# Altium PCB lagd_pcb.PcbDoc (part 1 of 7)
Units mm, origin at the board's own origin, x right, y up, seen from the top; angles counter-clockwise.
Board outline 172 x 145 mm, 6 copper layers (Top Layer, Layer 1, Layer 2, Layer 3, Layer 4, Bottom Layer), stack 0.816 mm thick; 588 components, 338 nets, 2165 pads, 565 vias.
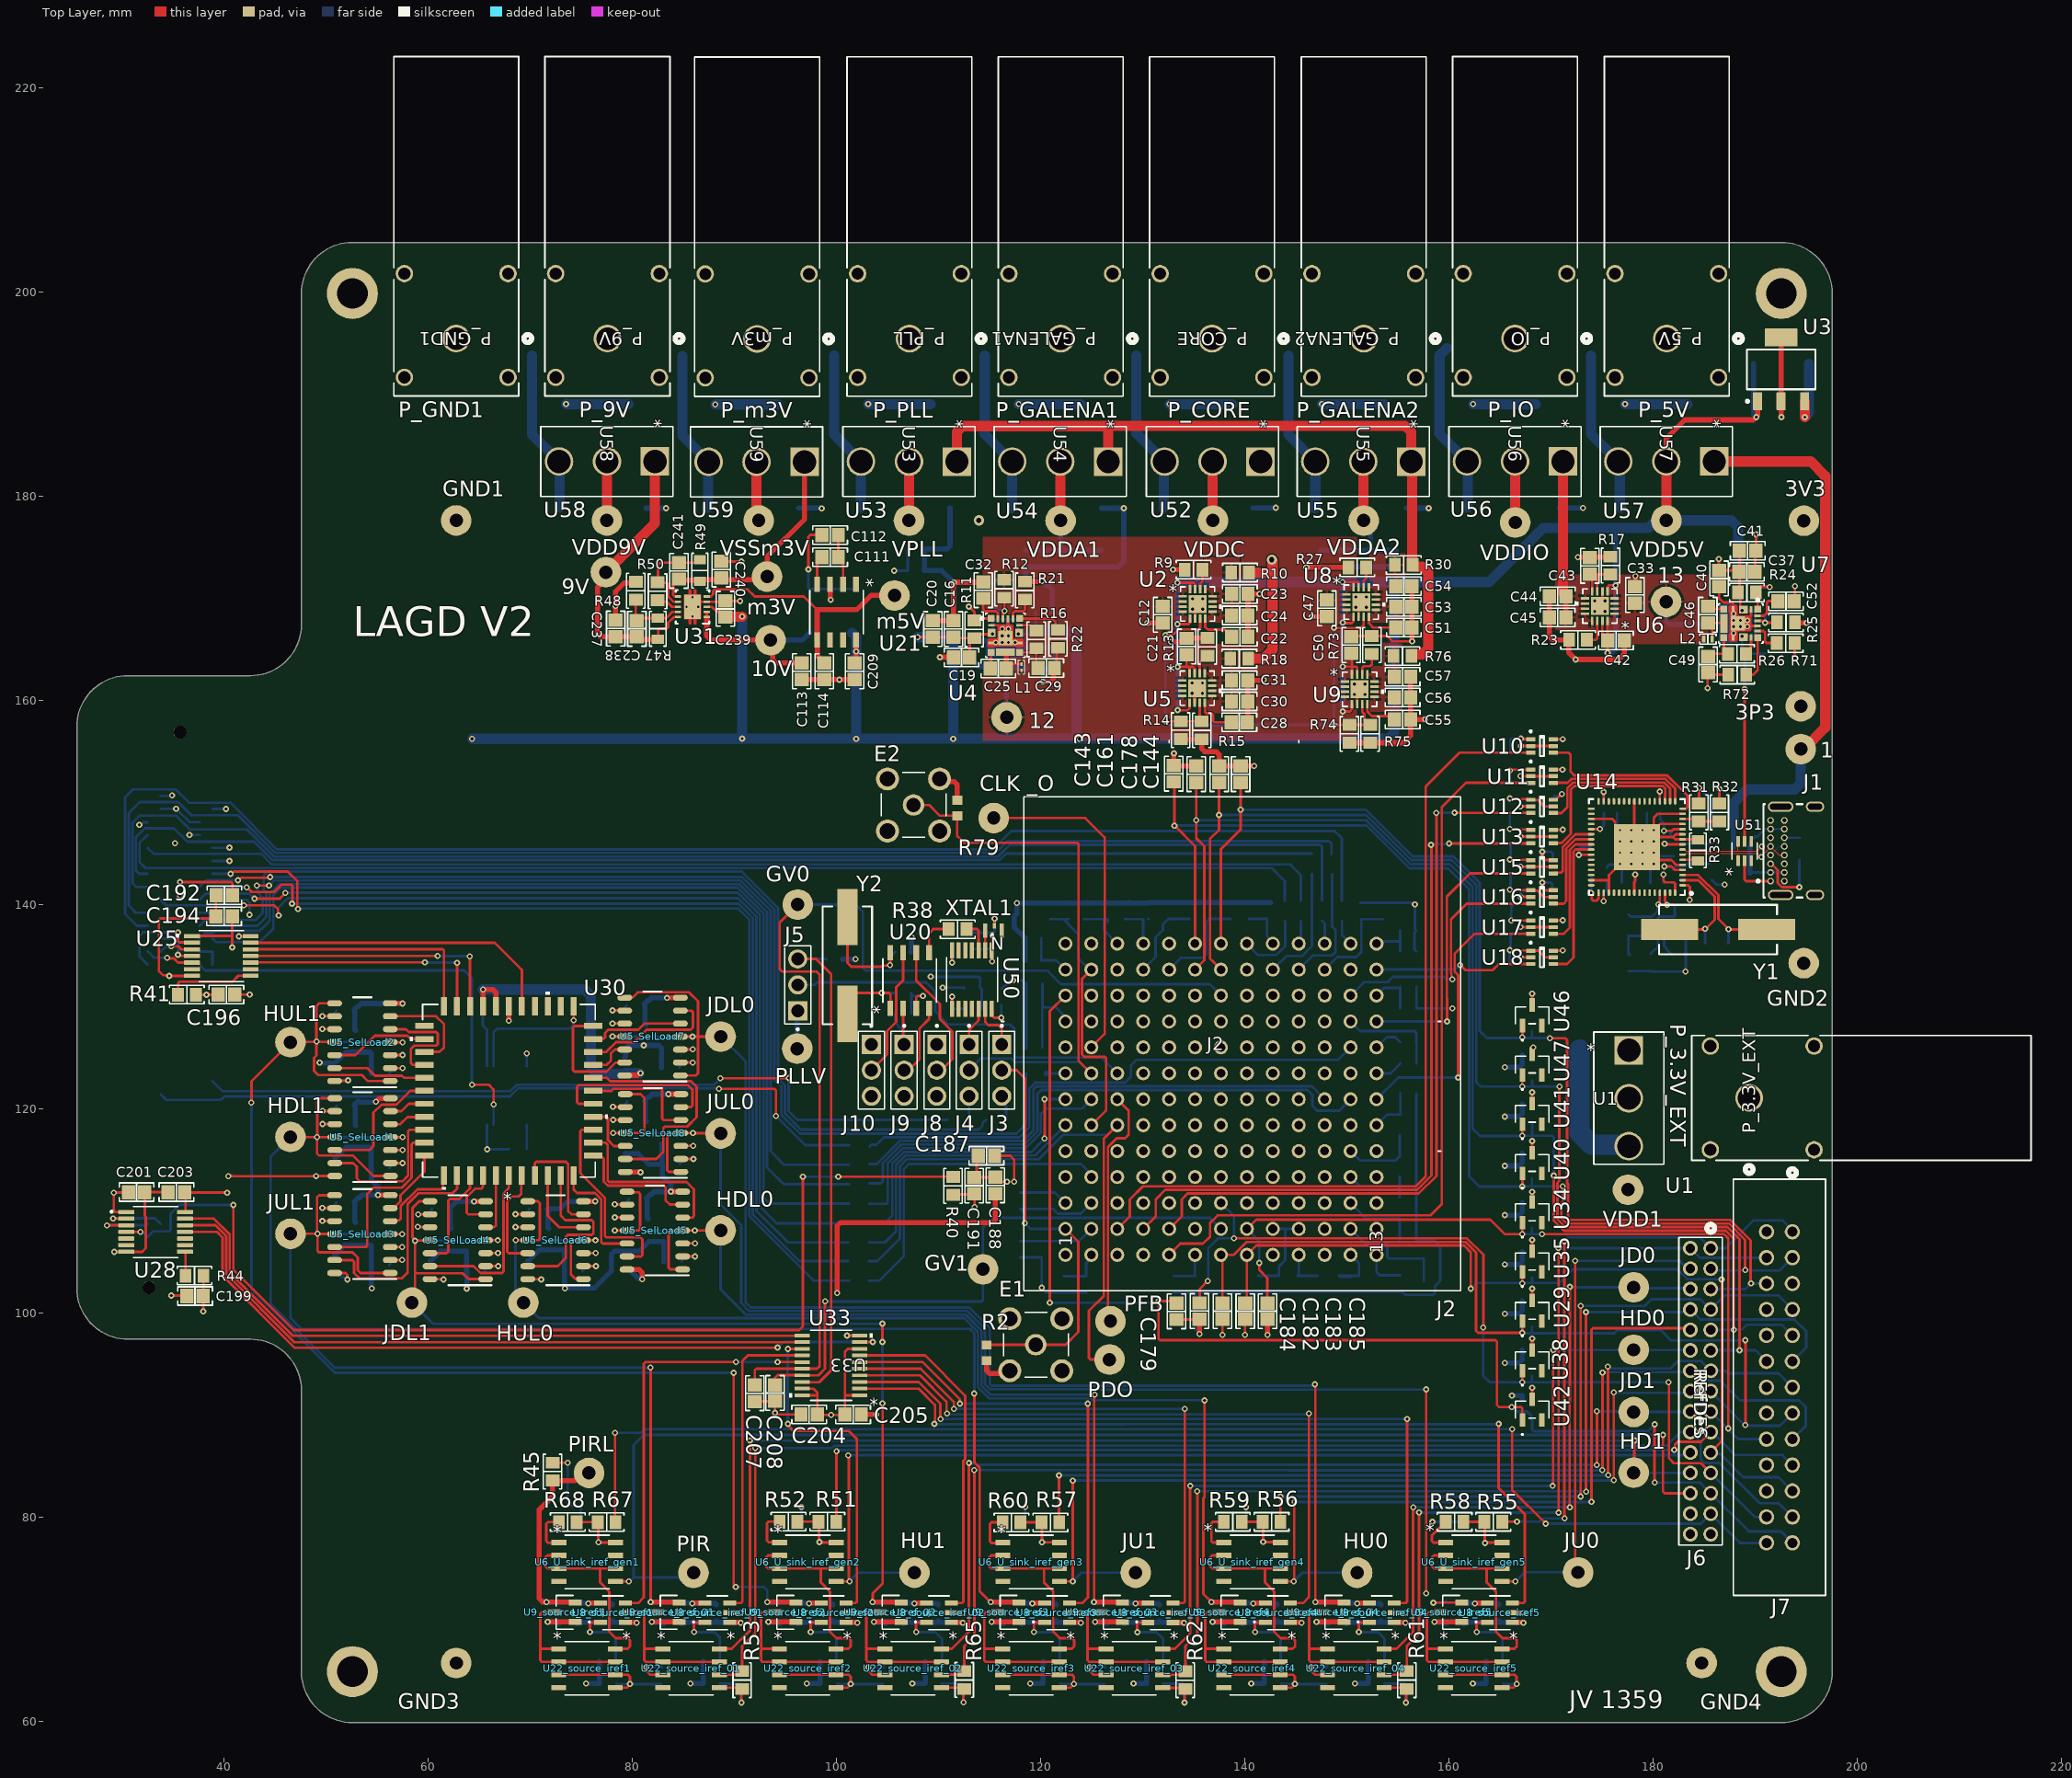
[diagram p0: Top Layer view]
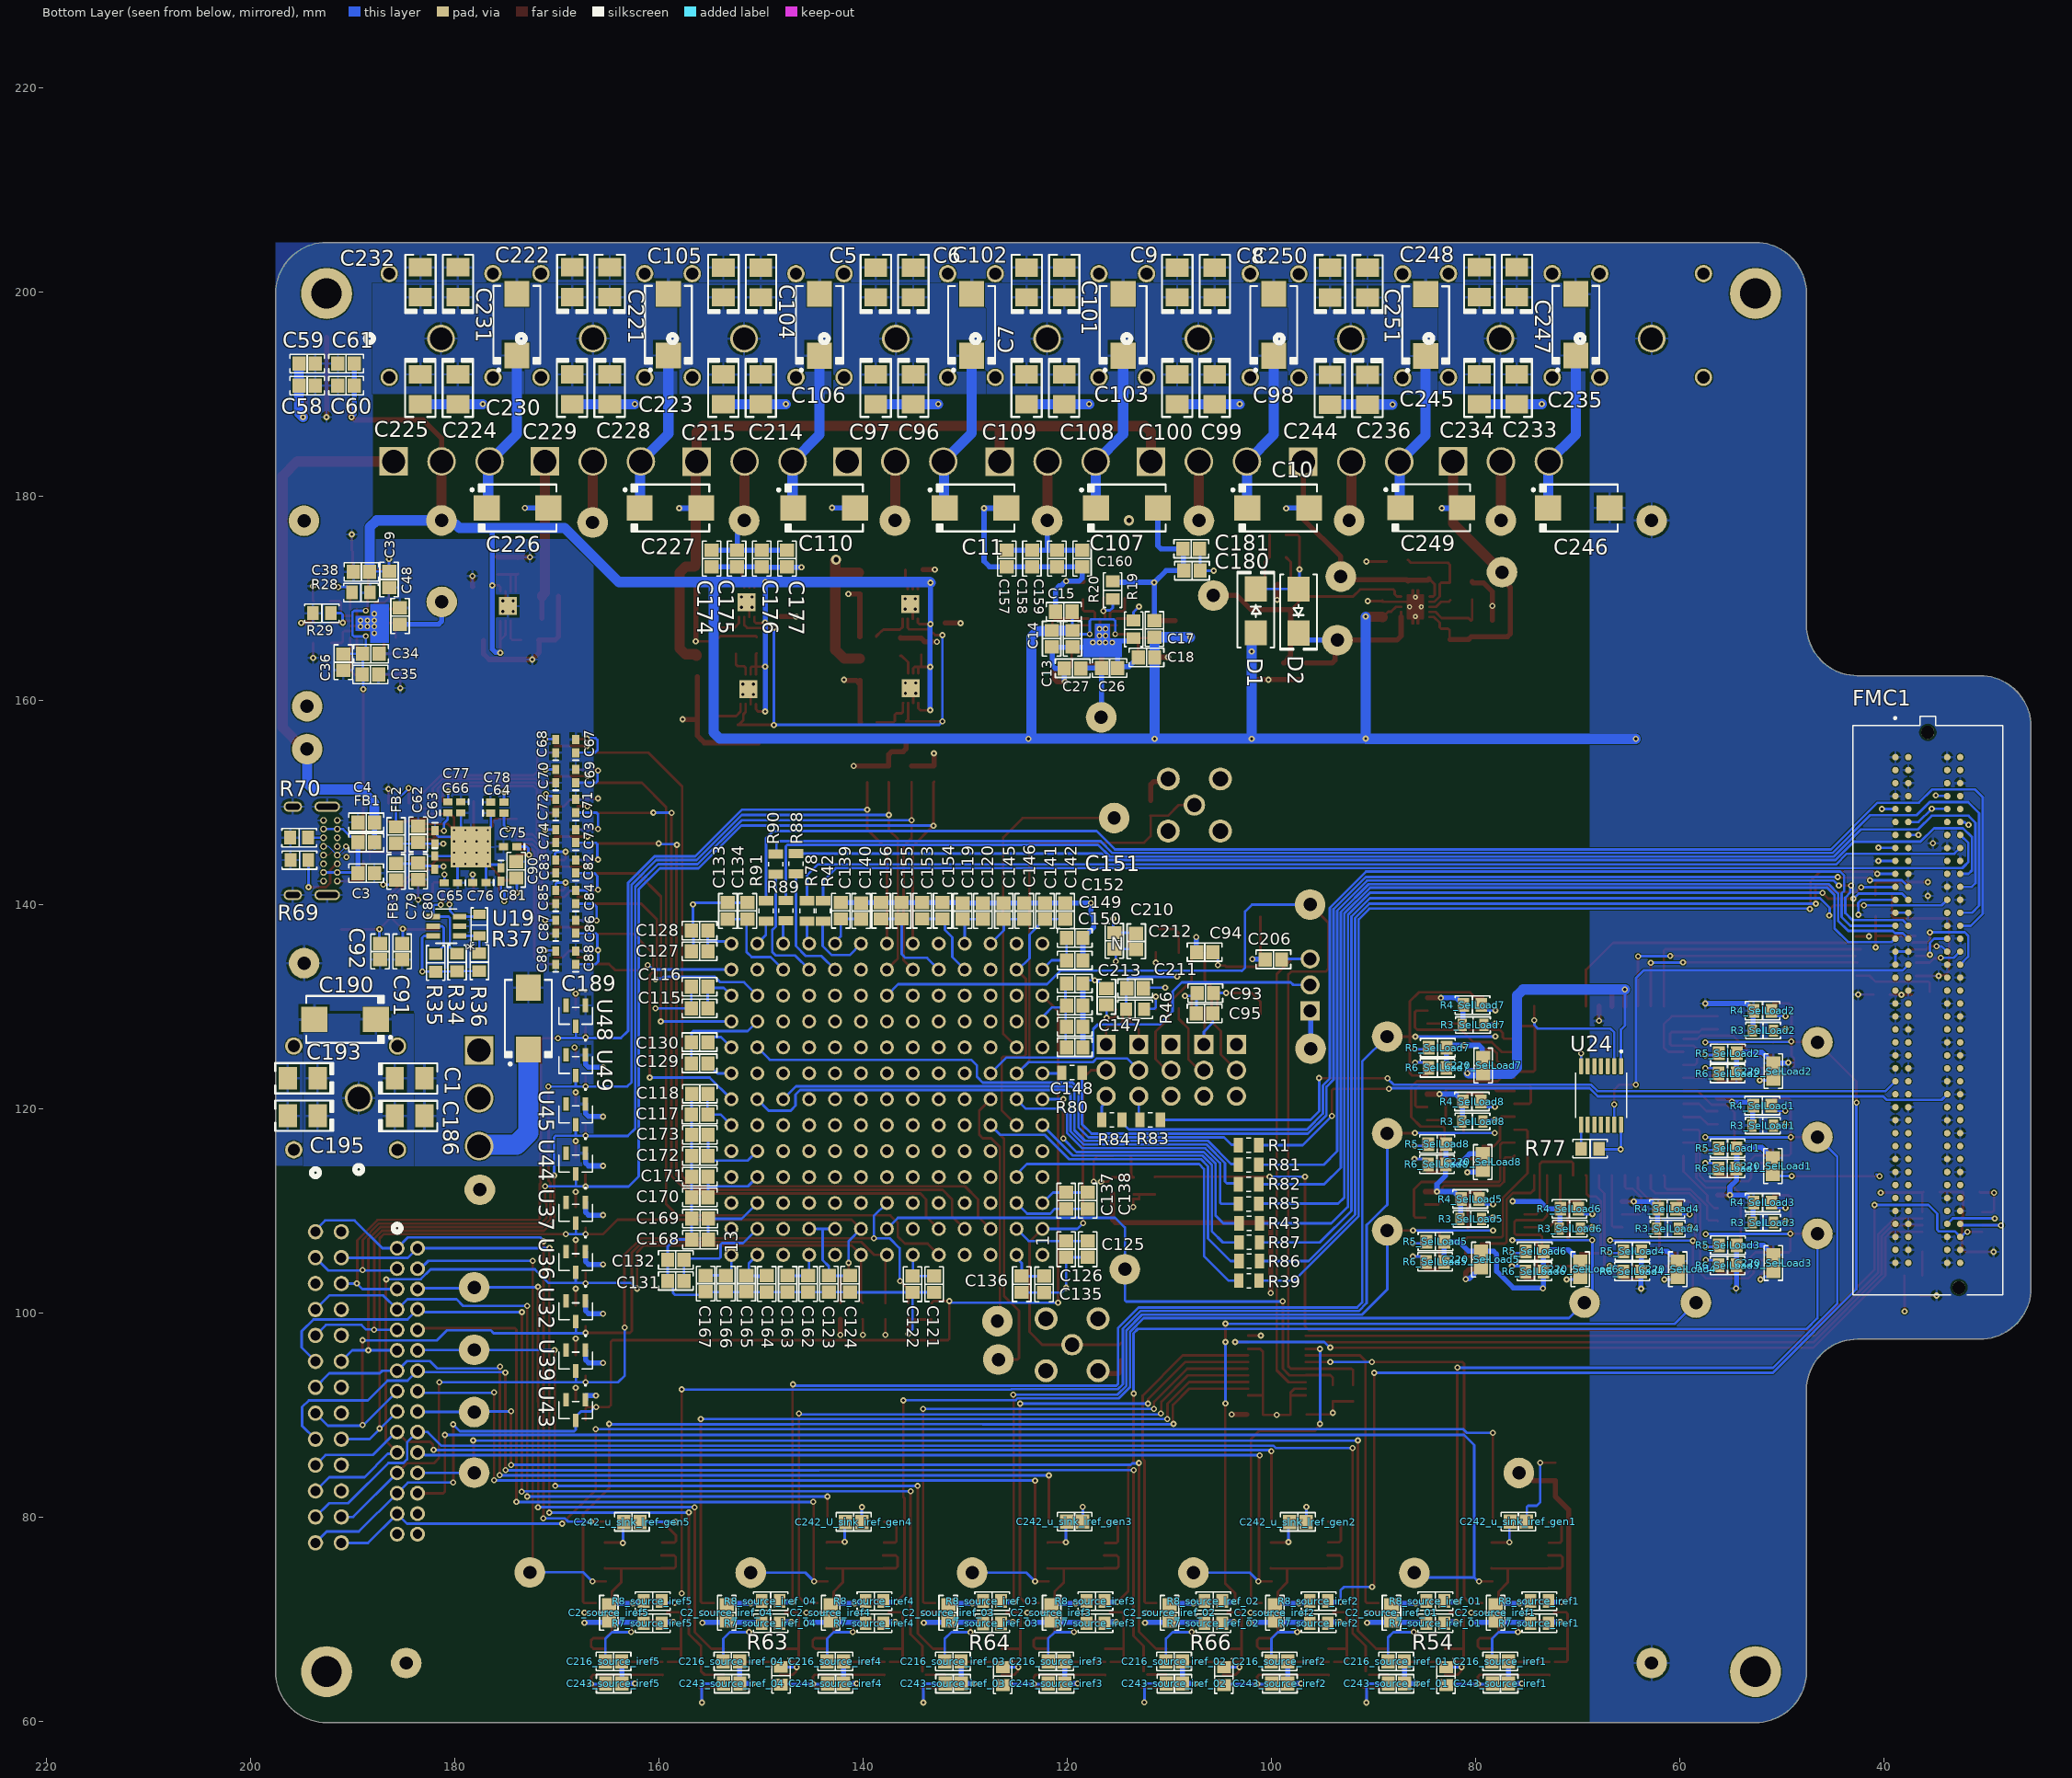
[diagram p1: Bottom Layer view, seen from below]
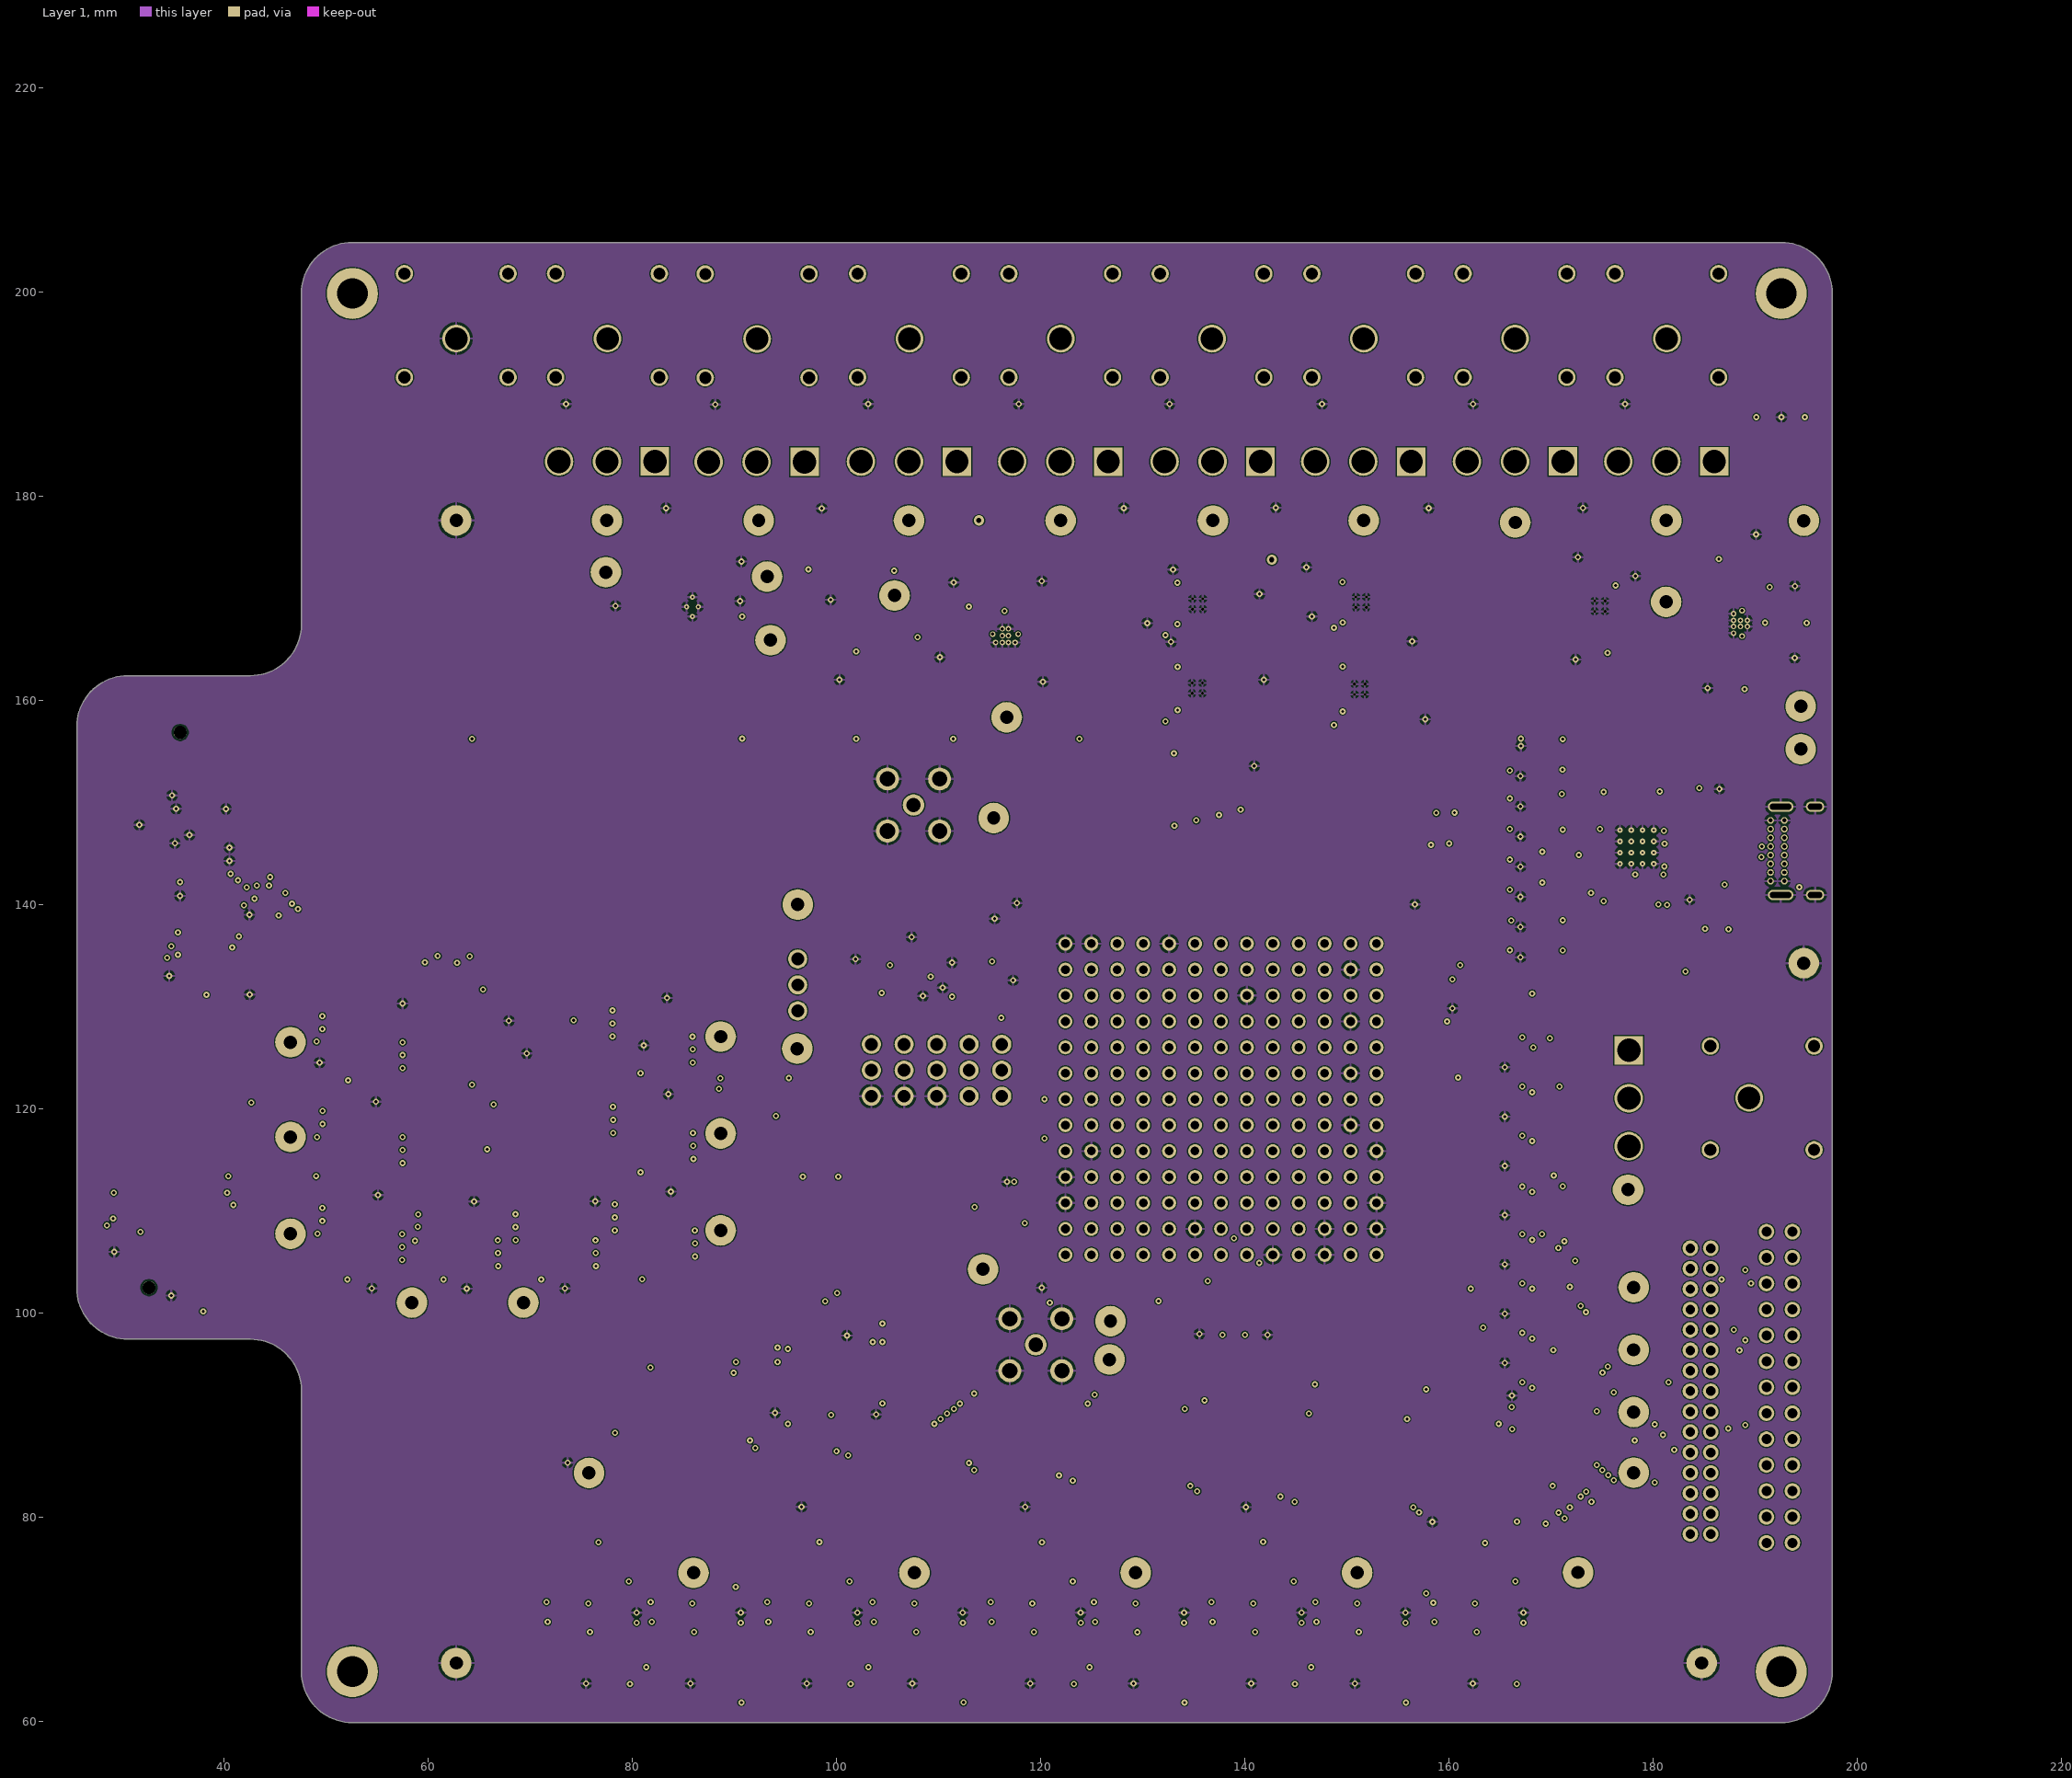
[diagram p2: Layer 1]
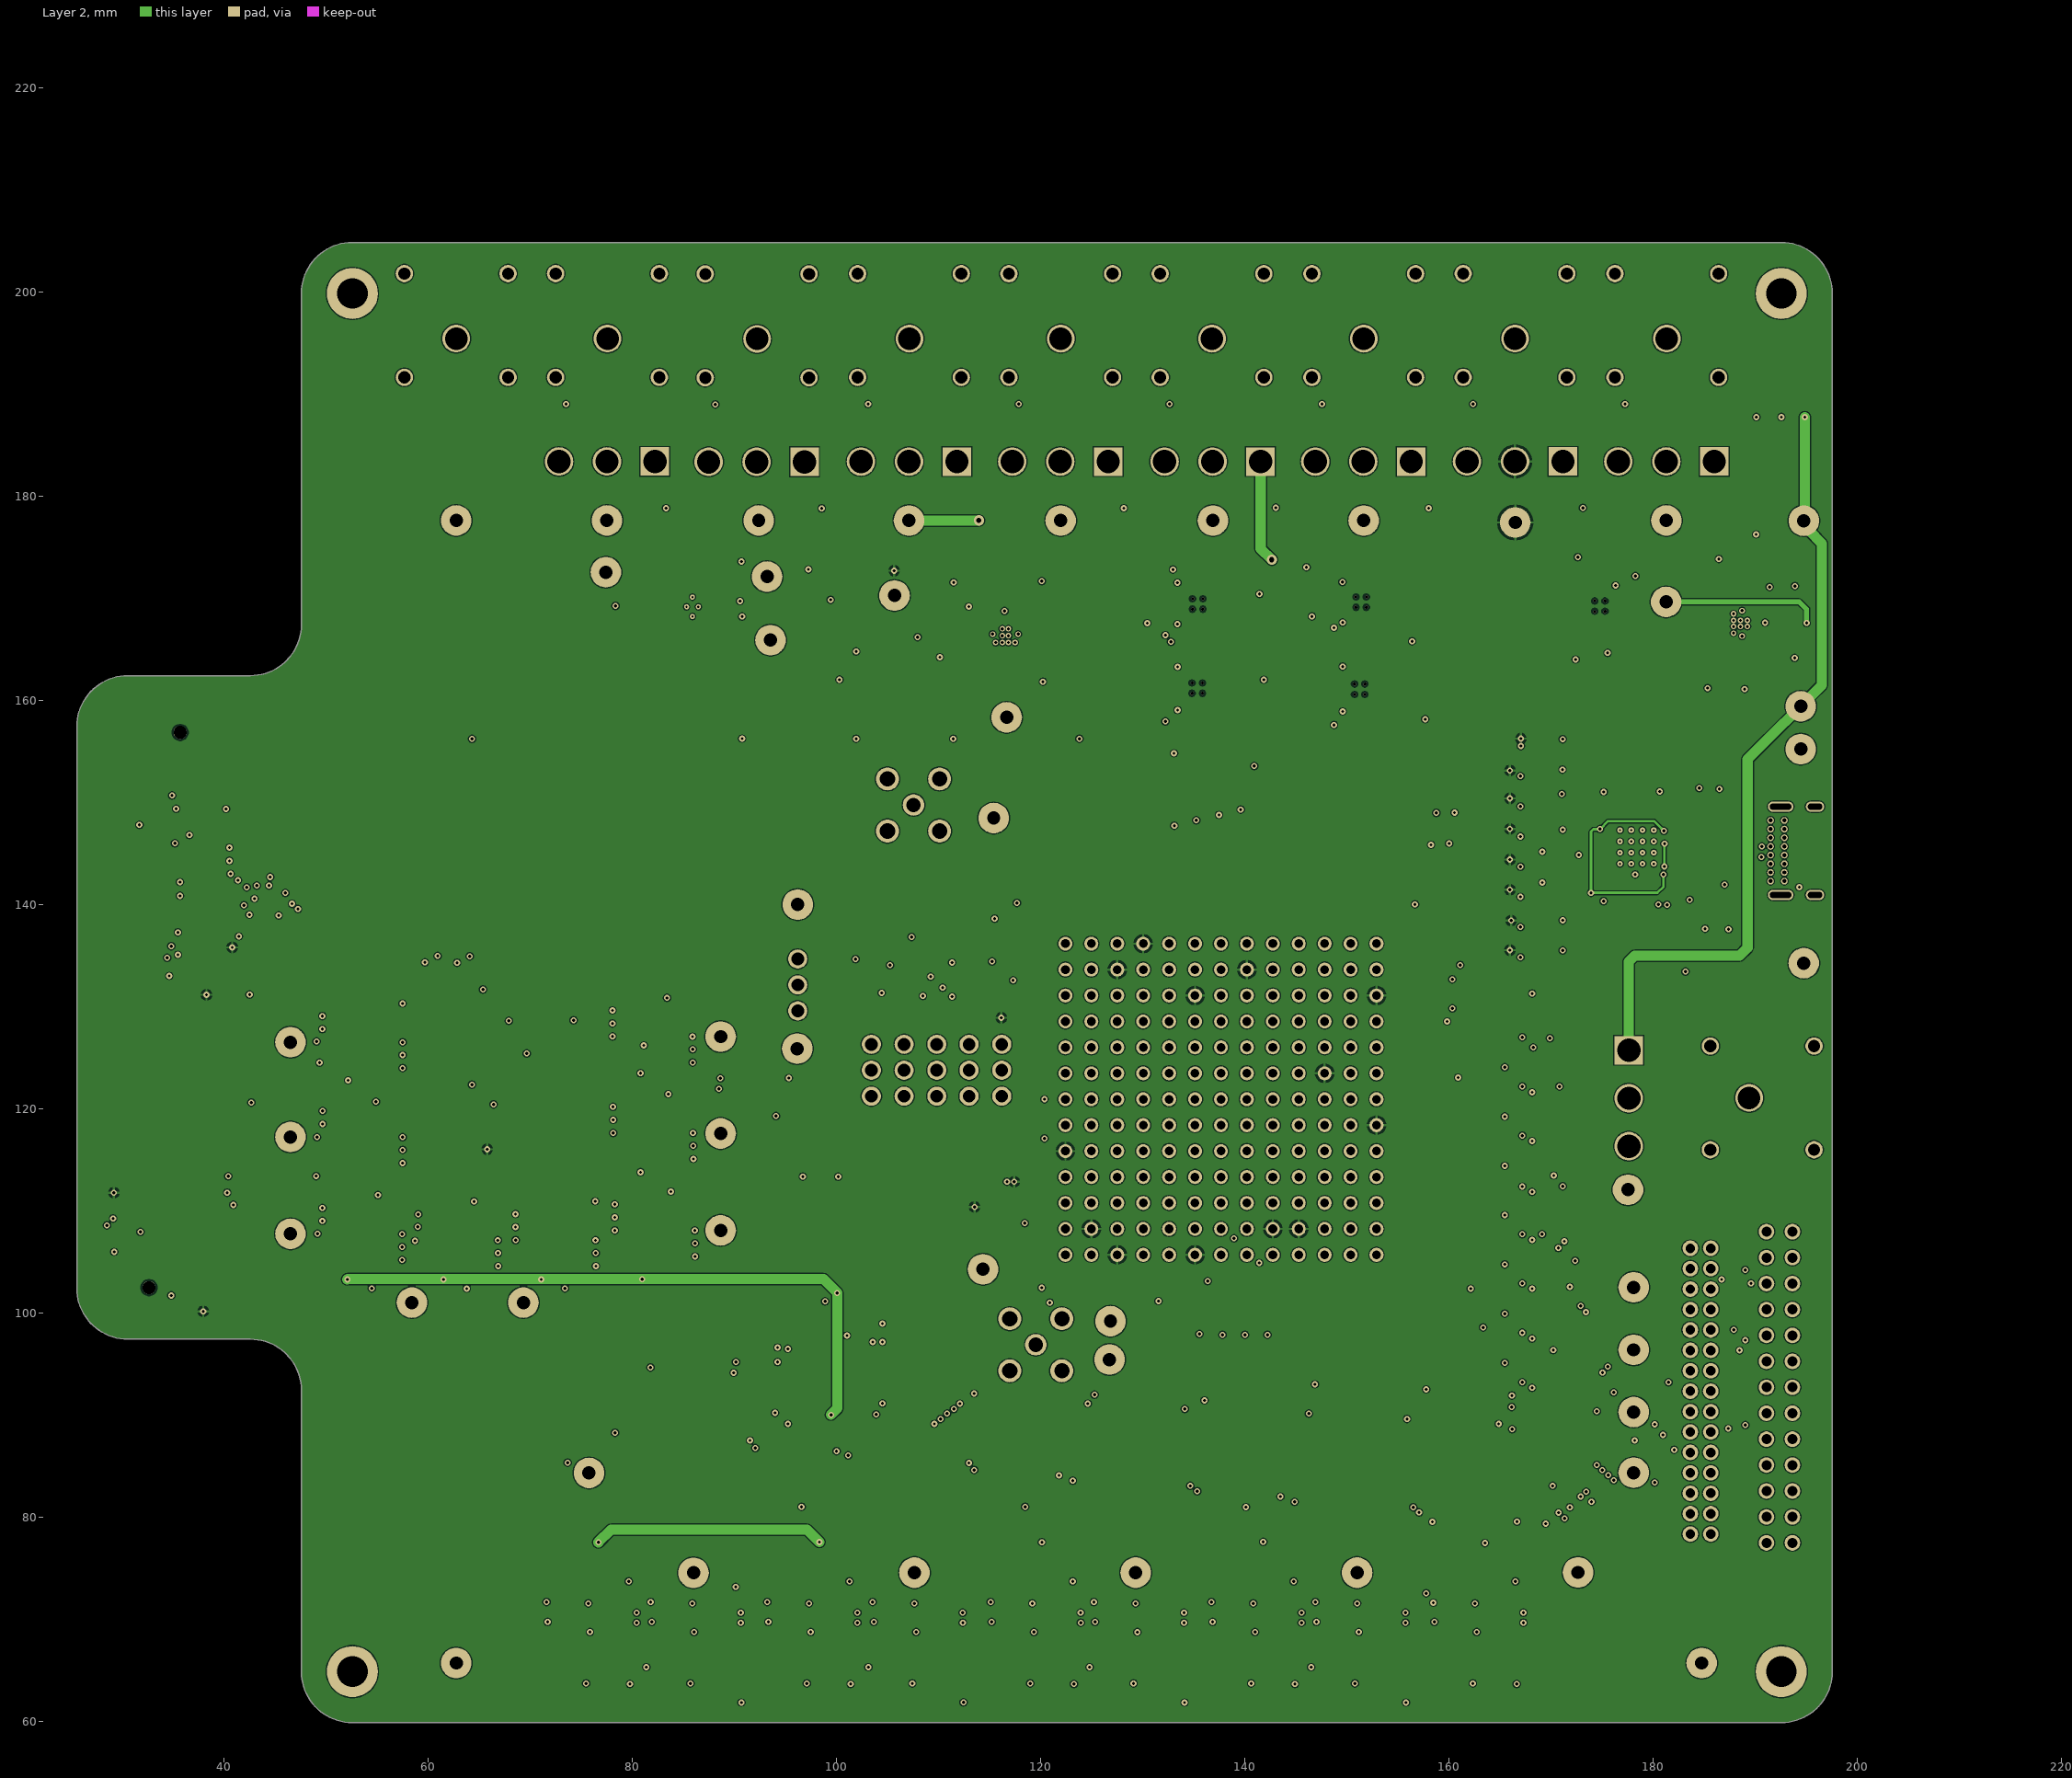
[diagram p3: Layer 2]
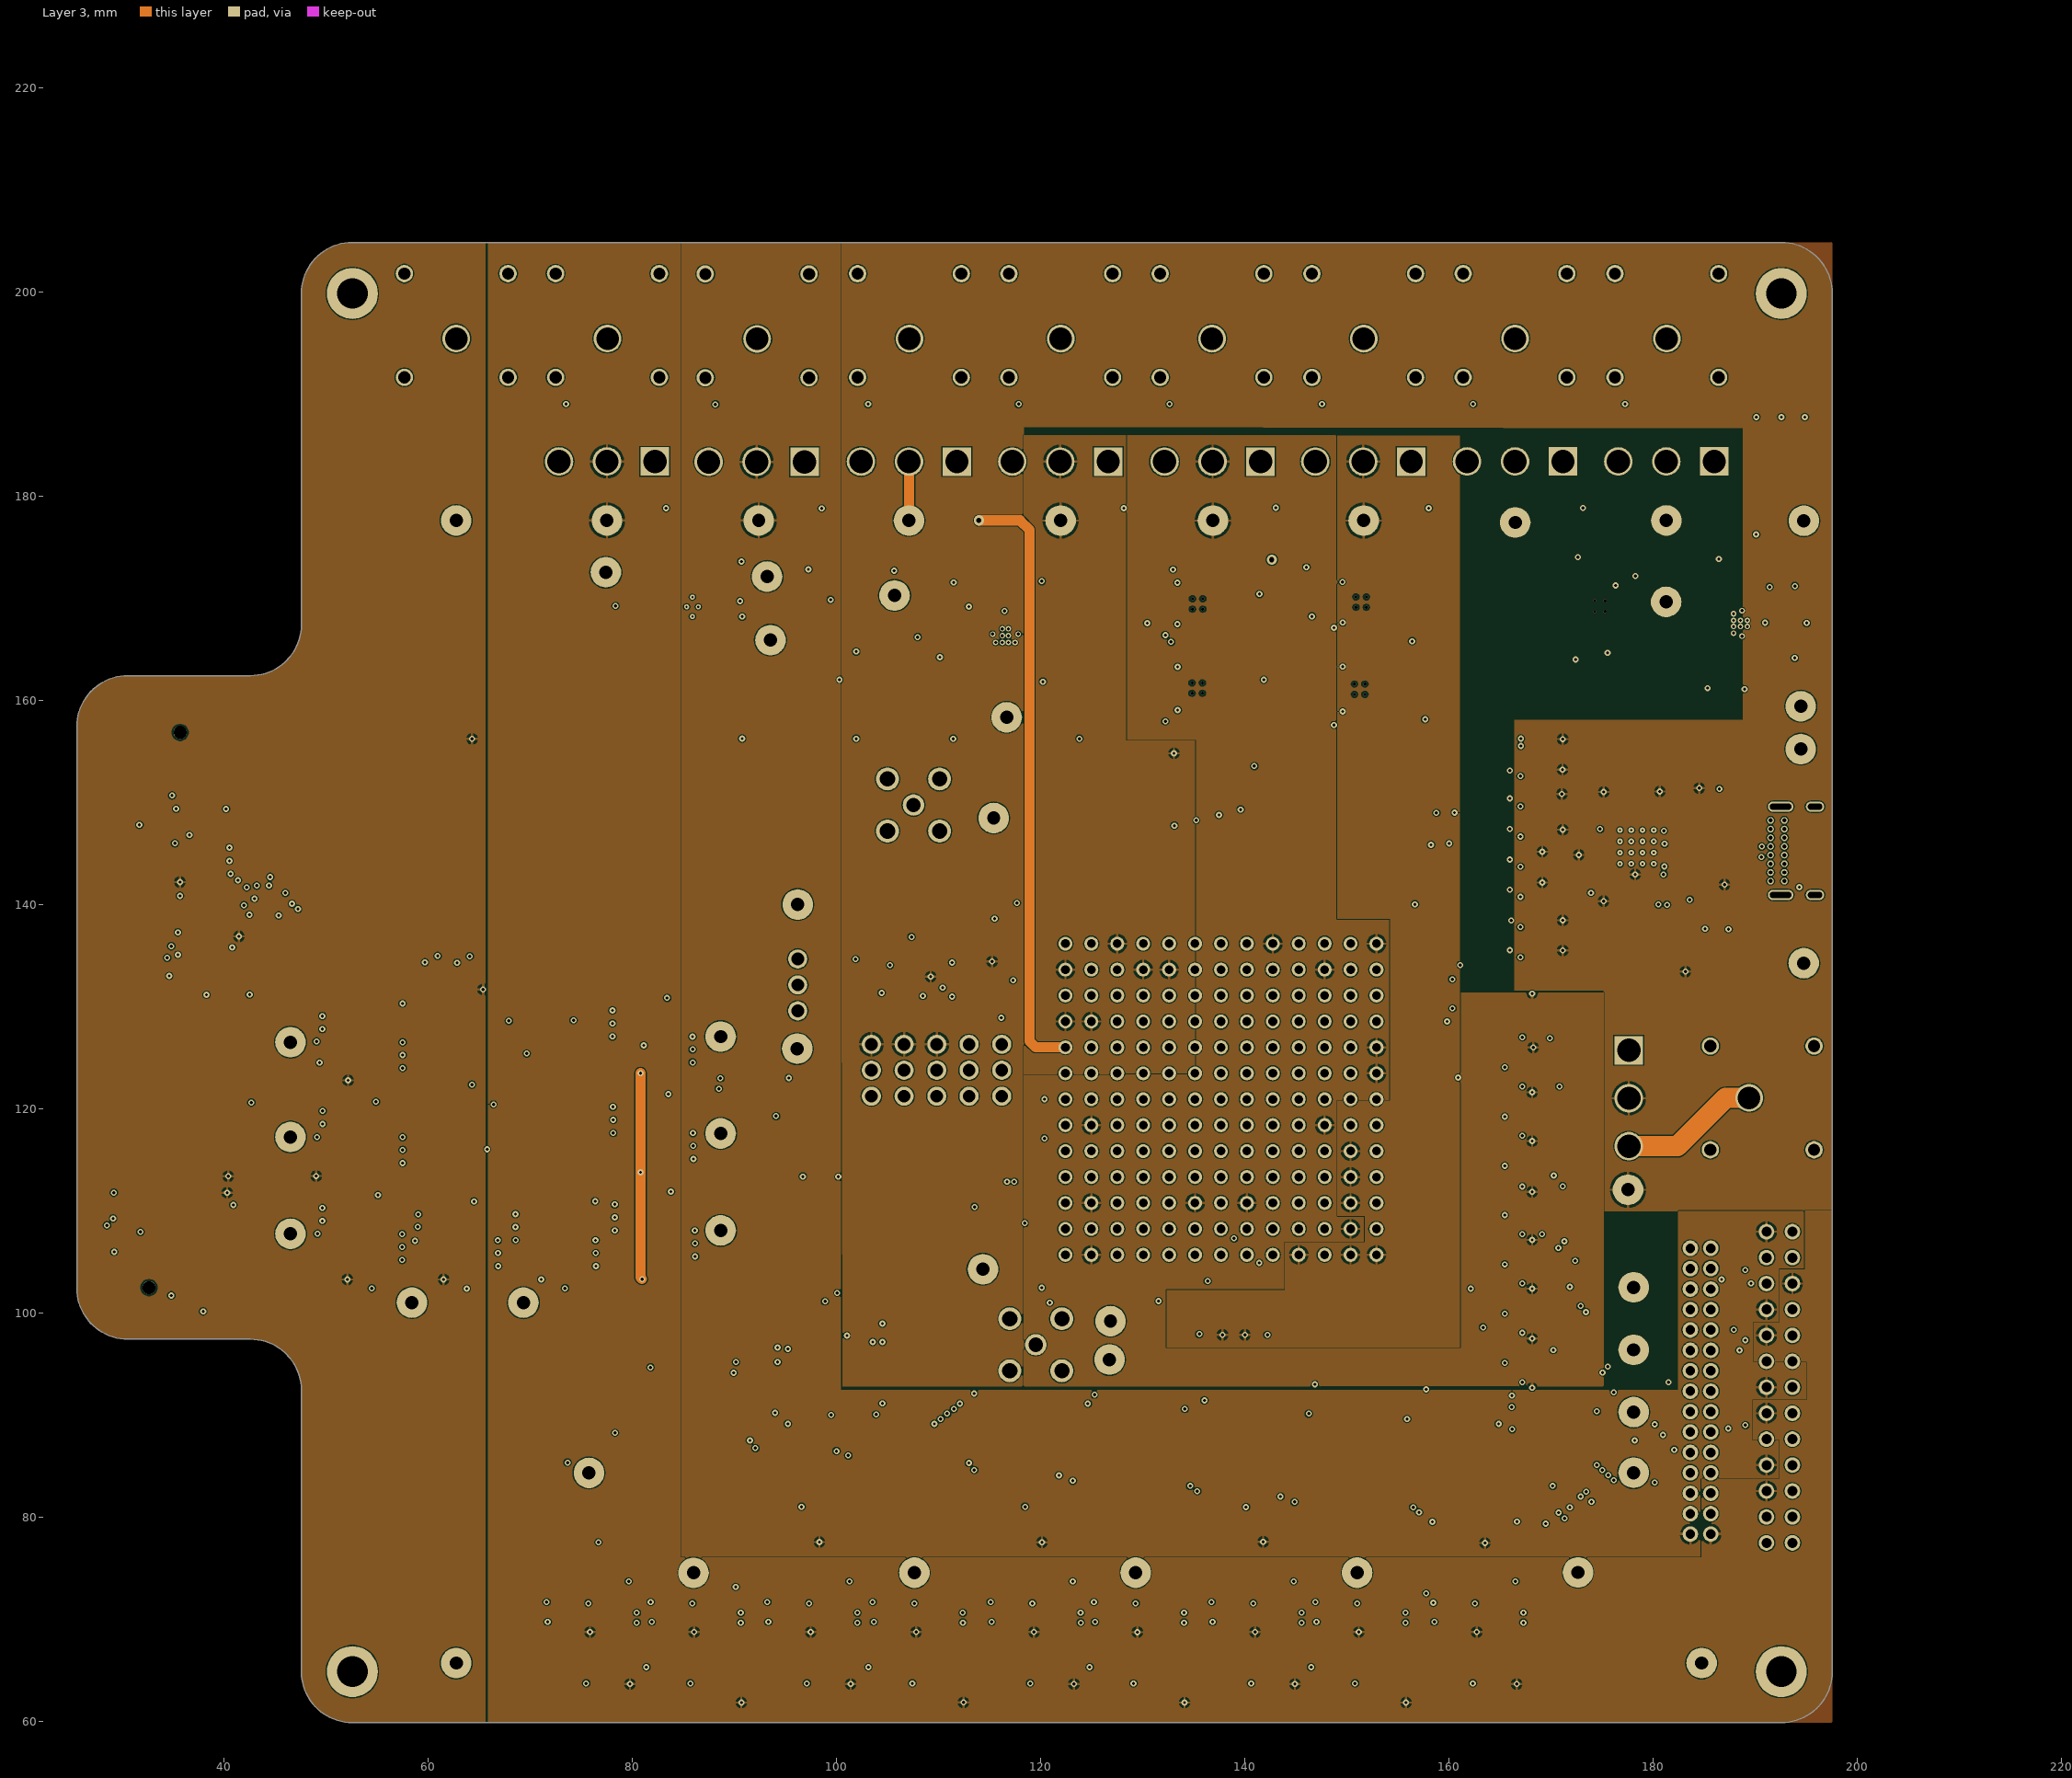
[diagram p4: Layer 3]
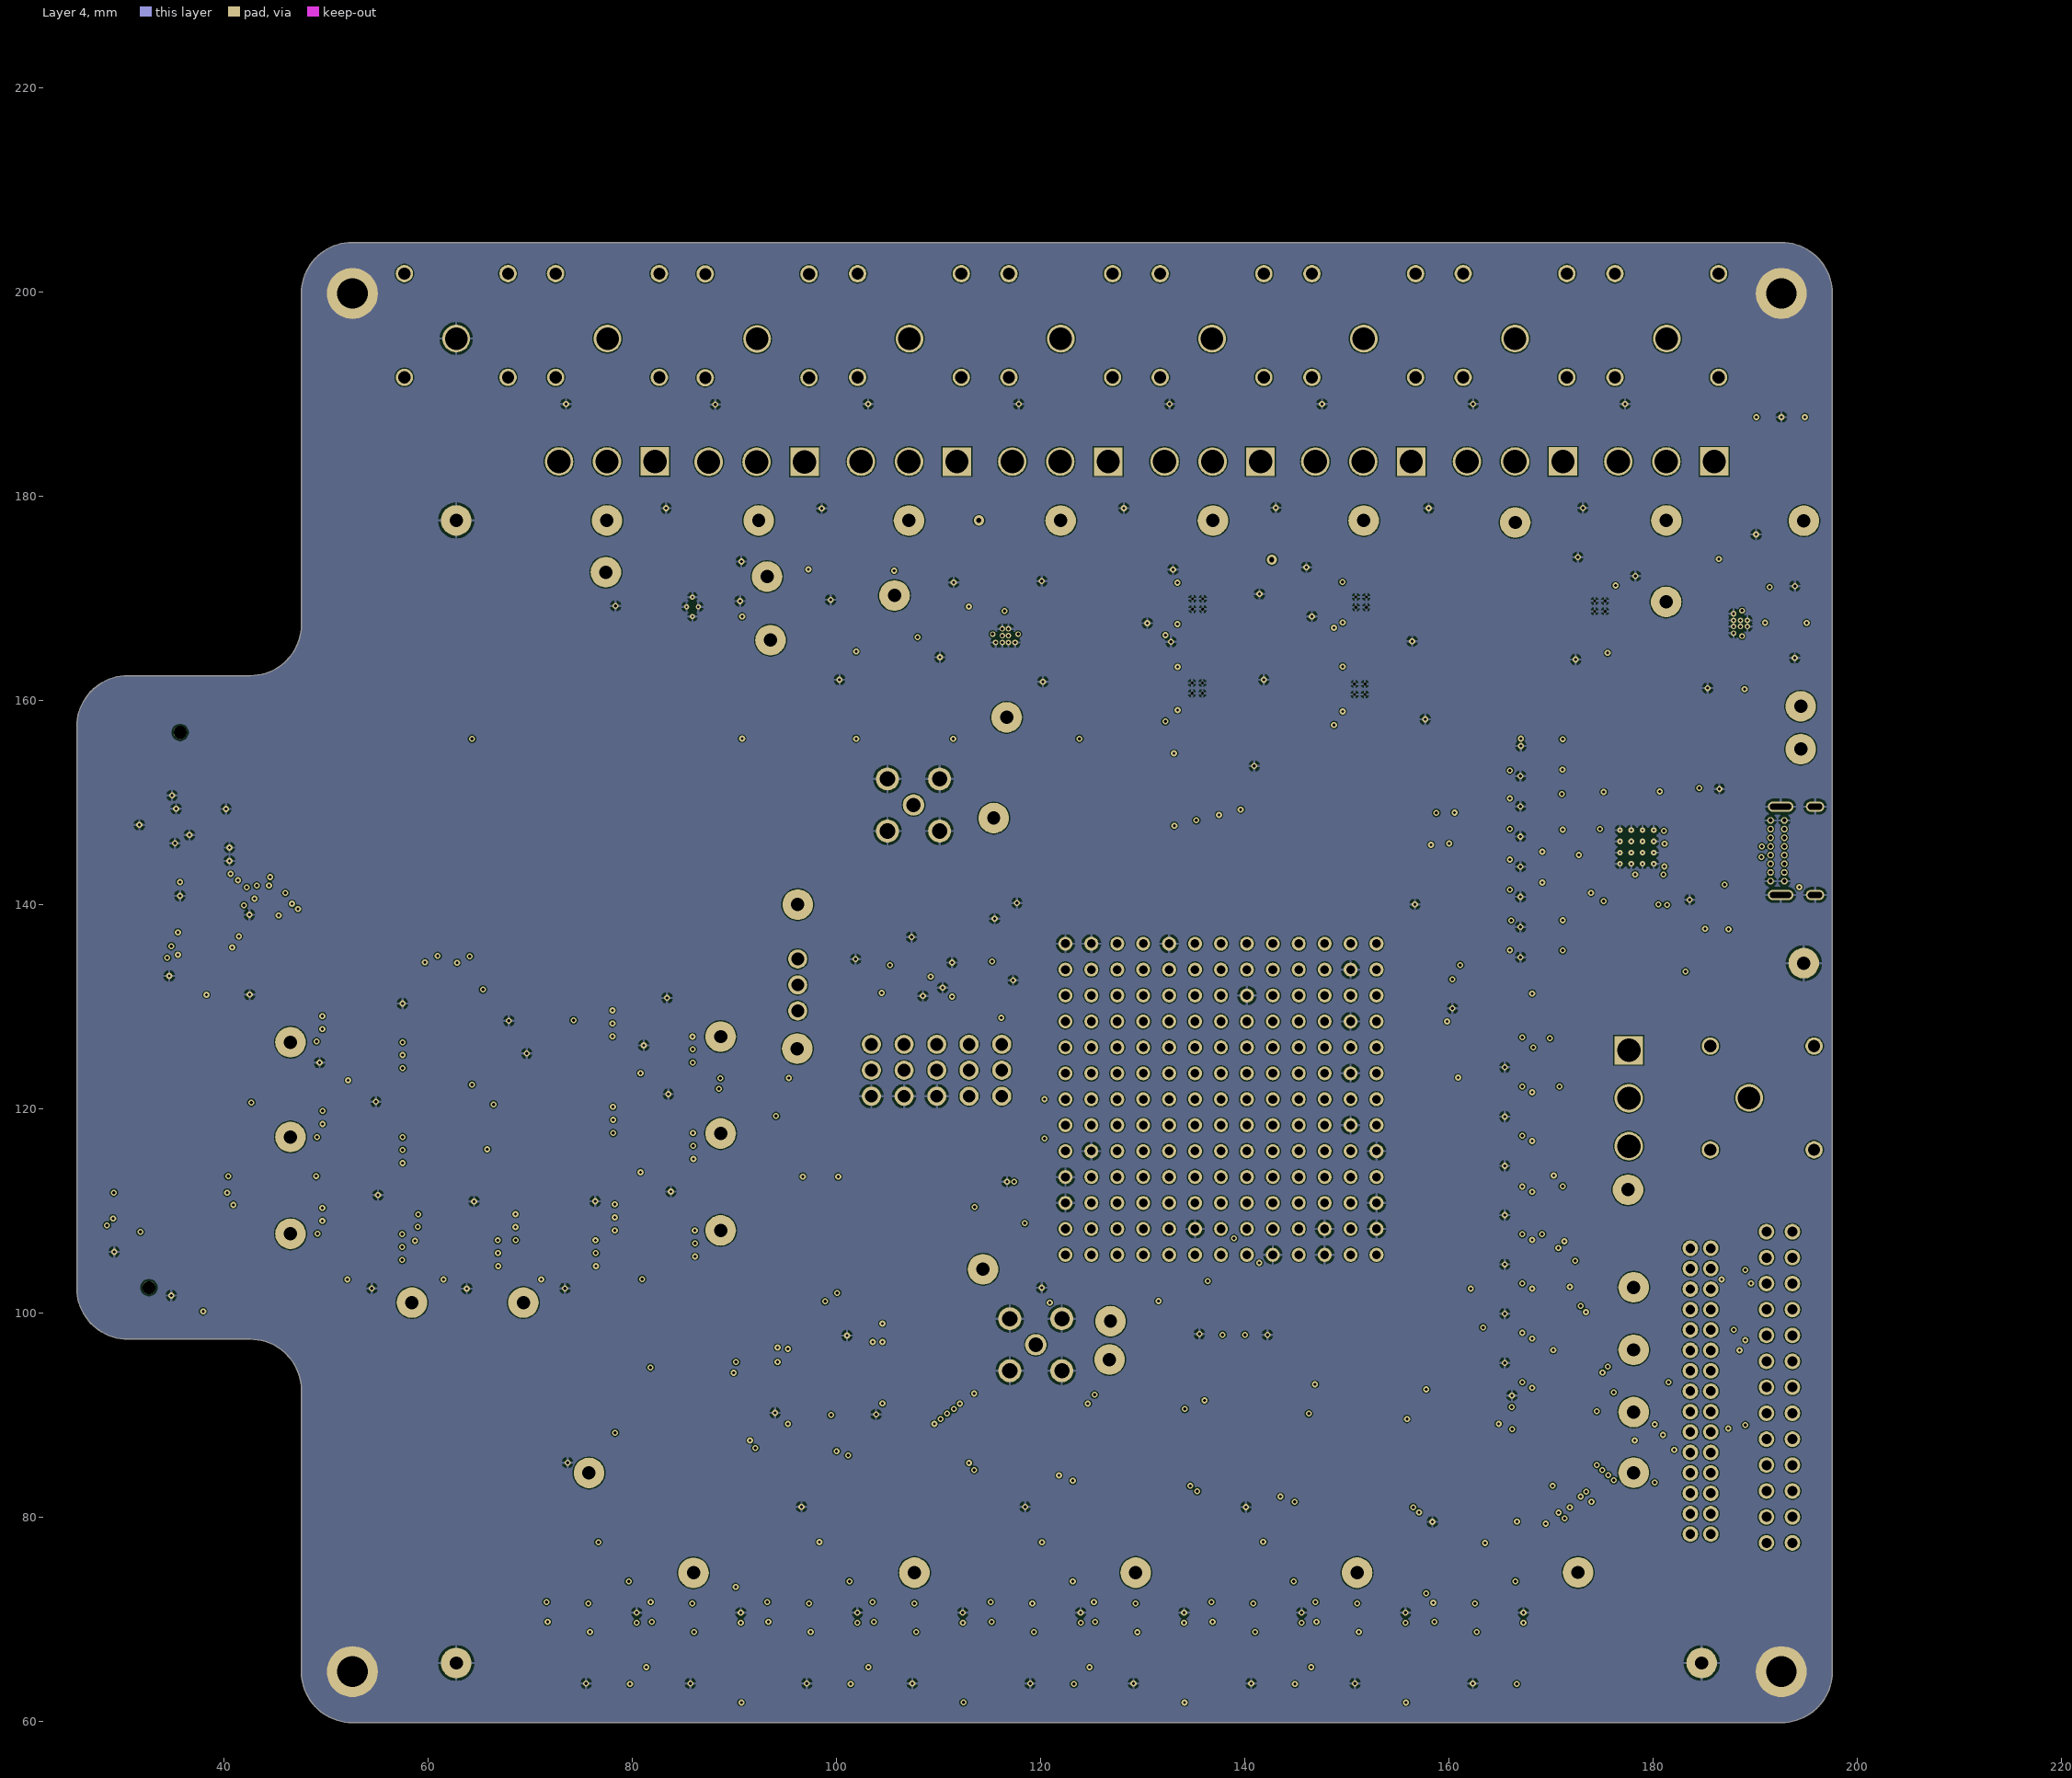
[diagram p5: Layer 4]
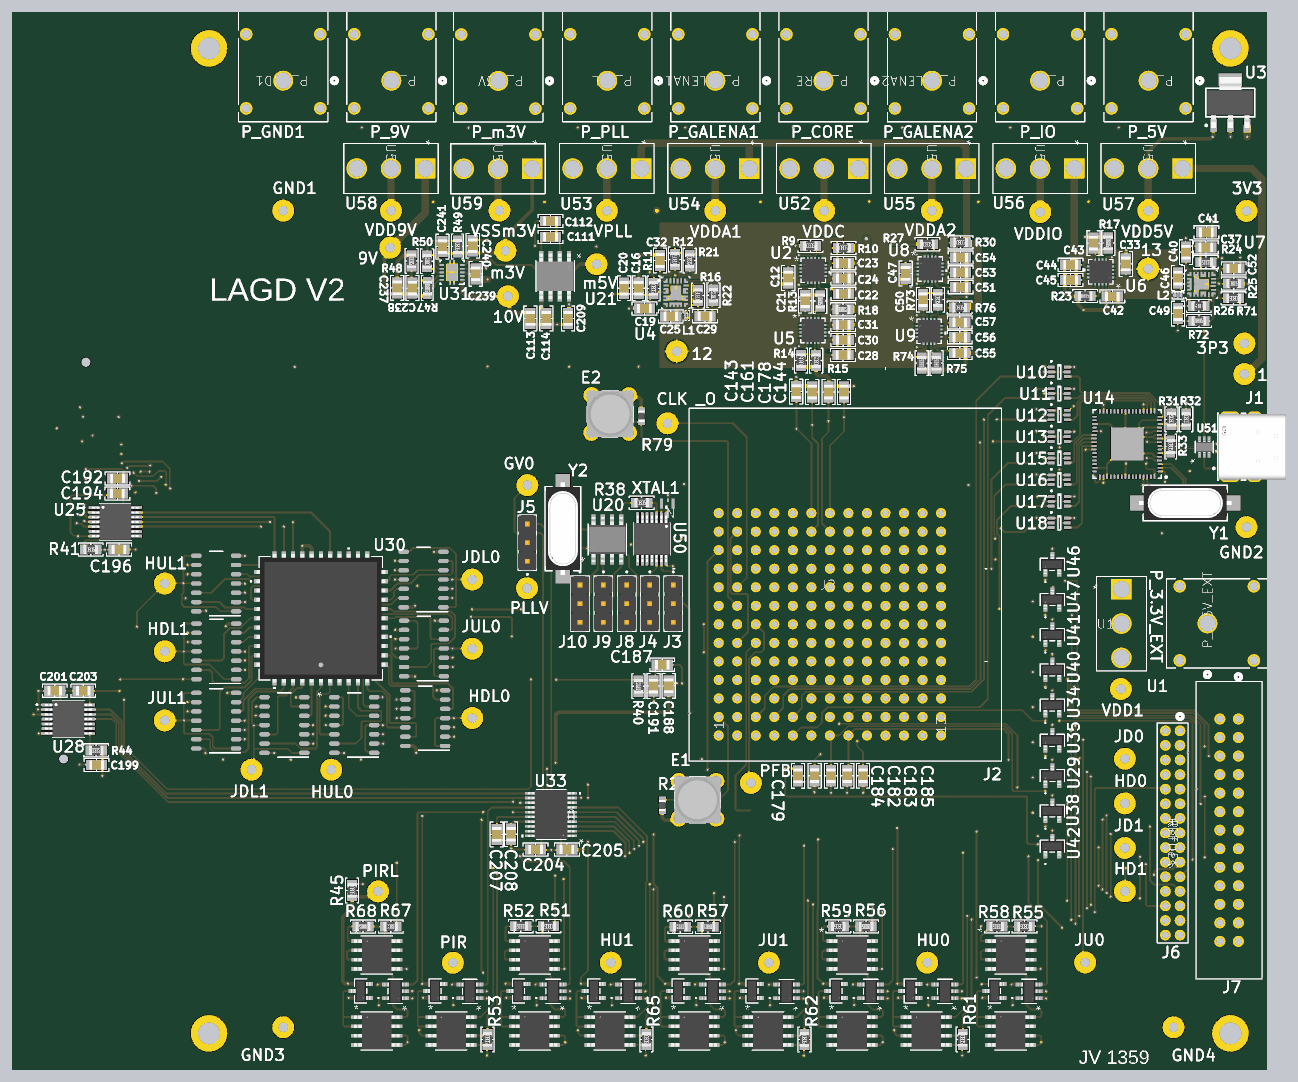
[diagram p11: 3D render of the assembled board from above, using the file's embedded part models]
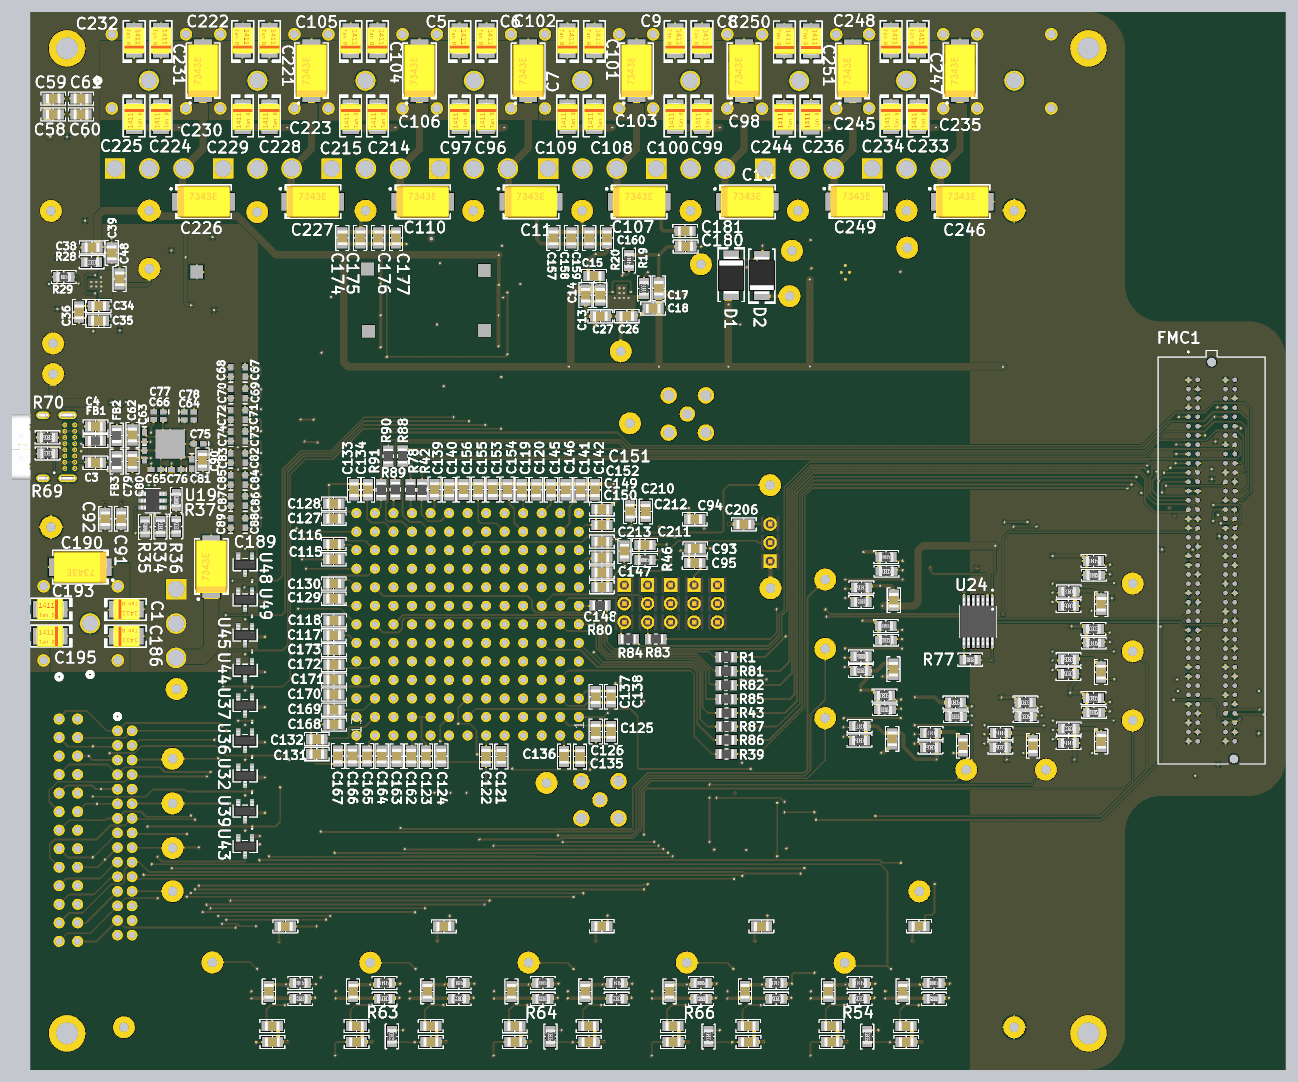
[diagram p12: 3D render of the assembled board from below, using the file's embedded part models]

## Layer stack, top to bottom
Top Solder: solder mask 0.0102, Solder Resist, Dk 3.5
Top Layer: signal copper 0.0356
Dielectric 1: prepreg 0.0711, PP-006, Dk 4.1
Layer 1: signal copper 0.035
Dielectric 2: prepreg 0.0711, PP-006, Dk 4.1
Layer 2: signal copper 0.035
Dielectric 3: dielectric 0.32, FR-4, Dk 4.8
Layer 3: signal copper 0.035
Dielectric 4: prepreg 0.0711, PP-006, Dk 4.1
Layer 4: signal copper 0.035
Dielectric 5: prepreg 0.0711, PP-006, Dk 4.1
Bottom Layer: signal copper 0.0356
Bottom Solder: solder mask 0.0102, Solder Resist, Dk 3.5

## Board outline
30.566,97.42 42.568,97.42 cw(c42.568,92.42) 47.568,92.42 47.566,92.42 47.566,64.859 ccw(c52.566,64.859) 52.566,59.859 192.566,59.859 ccw(c192.566,64.859) 197.566,64.859 197.566,199.859 ccw(c192.566,199.859) 192.566,204.859 52.566,204.859 ccw(c52.566,199.859) 47.566,199.859 47.568,199.861 47.568,167.42 cw(c42.568,167.42) 42.568,162.42 30.568,162.42 ccw(c30.568,157.42) 25.568,157.42 25.568,102.42 ccw(c30.568,102.42)

## Design rules (kind name [scope] priority, off if disabled: settings)
Clearance [All] p1: gap=0.1 ignorepadtopadclearanceinfootprint=FALSE except(0.15: Arc-Text Track-Text SMDPad-Text THPad-Text Via-Text Fill-Text Poly-Text Region-Text Text-Text; 0.2: Arc-Hole Track-Hole SMDPad-Hole THPad-Hole Via-Hole Fill-Hole Poly-Hole Region-Hole Text-Hole)
DiffPairsRouting DiffPair_DiffPairsRouting [InDifferentialPair ('D')] p1: maxlimit=0.127 minlimit=0.127 mostfreqgap=0.127 toplayer_minwidth=0.11 toplayer_maxwidth=0.11 toplayer_prefwidth=0.11 midlayer1_minwidth=0.043 midlayer1_maxwidth=0.043 midlayer1_prefwidth=0.043 midlayer2_minwidth=0.057 midlayer2_maxwidth=0.057 midlayer2_prefwidth=0.057 midlayer3_minwidth=0.057 midlayer3_maxwidth=0.057 midlayer3_prefwidth=0.057 midlayer4_minwidth=0.043 midlayer4_maxwidth=0.043 midlayer4_prefwidth=0.043 bottomlayer_minwidth=0.11 bottomlayer_maxwidth=0.11 bottomlayer_prefwidth=0.11 impedanceprofiledriven=TRUE impedanceprofileid={FF992A0A-B0BE-4B2B-9354-F0D5E5B57722} impedanceprofilevalue=90.000000 maxuncoupledlength=12.7
DiffPairsRouting DiffPair_DiffPairsRouting_1 [InDifferentialPair ('D')] p2: maxlimit=0.127 minlimit=0.127 mostfreqgap=0.127 toplayer_minwidth=0.11 toplayer_maxwidth=0.11 toplayer_prefwidth=0.11 midlayer1_minwidth=0.043 midlayer1_maxwidth=0.043 midlayer1_prefwidth=0.043 midlayer2_minwidth=0.057 midlayer2_maxwidth=0.057 midlayer2_prefwidth=0.057 midlayer3_minwidth=0.057 midlayer3_maxwidth=0.057 midlayer3_prefwidth=0.057 midlayer4_minwidth=0.043 midlayer4_maxwidth=0.043 midlayer4_prefwidth=0.043 bottomlayer_minwidth=0.11 bottomlayer_maxwidth=0.11 bottomlayer_prefwidth=0.11 impedanceprofiledriven=TRUE impedanceprofileid={FF992A0A-B0BE-4B2B-9354-F0D5E5B57722} impedanceprofilevalue=90.000000 maxuncoupledlength=12.7
DiffPairsRouting "Schematic Differential Pairs Routing" [InNet('D_N')] p3: maxlimit=0.254 minlimit=0.254 mostfreqgap=0.254 toplayer_minwidth=0.381 toplayer_maxwidth=0.381 toplayer_prefwidth=0.381 midlayer1_minwidth=0.381 midlayer1_maxwidth=0.381 midlayer1_prefwidth=0.381 midlayer2_minwidth=0.381 midlayer2_maxwidth=0.381 midlayer2_prefwidth=0.381 midlayer3_minwidth=0.381 midlayer3_maxwidth=0.381 midlayer3_prefwidth=0.381 midlayer4_minwidth=0.381 midlayer4_maxwidth=0.381 midlayer4_prefwidth=0.381 bottomlayer_minwidth=0.381 bottomlayer_maxwidth=0.381 bottomlayer_prefwidth=0.381 maxuncoupledlength=12.7
DiffPairsRouting DiffPairsRouting_1 [InDifferentialPair('D')] p4: maxlimit=0.127 minlimit=0.127 mostfreqgap=0.127 toplayer_minwidth=0.11 toplayer_maxwidth=0.11 toplayer_prefwidth=0.11 midlayer1_minwidth=0.043 midlayer1_maxwidth=0.043 midlayer1_prefwidth=0.043 midlayer2_minwidth=0.057 midlayer2_maxwidth=0.057 midlayer2_prefwidth=0.057 midlayer3_minwidth=0.057 midlayer3_maxwidth=0.057 midlayer3_prefwidth=0.057 midlayer4_minwidth=0.043 midlayer4_maxwidth=0.043 midlayer4_prefwidth=0.043 bottomlayer_minwidth=0.11 bottomlayer_maxwidth=0.11 bottomlayer_prefwidth=0.11 impedanceprofiledriven=TRUE impedanceprofileid={FF992A0A-B0BE-4B2B-9354-F0D5E5B57722} impedanceprofilevalue=90.000000 maxuncoupledlength=12.7
HoleSize [All] p1: absolutevalues=TRUE maxlimit=6 minlimit=0.2 maxpercent=80.000 minpercent=20.000
HoleToHoleClearance [All] p1: gap=0.25 allowstackedmicrovias=TRUE
MatchedLengths DiffPair_MatchedLengths [InDifferentialPair ('D')] p1: tolerance=25.4 checknetsindiffpair=FALSE checkdiffpairvsdiffpair=TRUE checkxsignals=TRUE checkothers=TRUE
MatchedLengths DiffPair_MatchedLengths_1 [InDifferentialPair ('D')] p2: tolerance=25.4 checknetsindiffpair=FALSE checkdiffpairvsdiffpair=TRUE checkxsignals=TRUE checkothers=TRUE
MatchedLengths DiffPair_MatchedLengths_2 [InDifferentialPair ('D')] p3: tolerance=25.4 checknetsindiffpair=FALSE checkdiffpairvsdiffpair=TRUE checkxsignals=TRUE checkothers=TRUE
MinimumSolderMaskSliver [All] p1: minsoldermaskwidth=0.1
PolygonConnect [All] p1: connectstyle=Relief reliefconductorwidth=0.254 reliefentries=4 polygonreliefangle="90 Angle" airgapwidth=0.254
RoutingVias [All] p1: holewidth=0.711 width=1.27 viastyle="Through Hole" minholewidth=0.075 minwidth=0.2 maxholewidth=0.711 maxwidth=2
SilkToSilkClearance [All] p1: silktosilkclearance=0.15
SilkToSolderMaskClearance [IsPad] p1: minsilkscreentomaskgap=0.15 clearancetoexposedcopper=TRUE
SolderMaskExpansion [All] p1: expansion=0.102 istentingtop=FALSE
SupplyNets "Schematic Supply Nets_21" [InNet('3V3_MUXED')] p1: voltage=0.000
SupplyNets "Schematic Supply Nets_13" [InNet('PCB_USB_3V3_GEN')] p2: voltage=0.000
SupplyNets "Schematic Supply Nets" [InNet('A0')] p3: voltage=0.000
SupplyNets "Schematic Supply Nets_22" [InNet('VBUS')] p4: voltage=0.000
SupplyNets "Schematic Supply Nets_20" [InNet('10V')] p5: voltage=0.000
SupplyNets "Schematic Supply Nets_19" [InNet('LDO_9V')] p6: voltage=0.000
SupplyNets "Schematic Supply Nets_18" [InNet('Vcore1')] p7: voltage=0.000
SupplyNets "Schematic Supply Nets_17" [InNet('1.0V')] p8: voltage=0.000
SupplyNets "Schematic Supply Nets_16" [InNet('A2')] p9: voltage=0.000
SupplyNets "Schematic Supply Nets_15" [InNet('-5V')] p10: voltage=0.000
SupplyNets "Schematic Supply Nets_14" [InNet('VBIAS')] p11: voltage=0.000
SupplyNets "Schematic Supply Nets_12" [InNet('LDO_m3V')] p12: voltage=0.000
SupplyNets "Schematic Supply Nets_11" [InNet('PCB_IO_1V8')] p13: voltage=0.000
SupplyNets "Schematic Supply Nets_10" [InNet('VPLL')] p14: voltage=0.000
SupplyNets "Schematic Supply Nets_9" [InNet('HUI0-')] p15: voltage=0.000
SupplyNets "Schematic Supply Nets_8" [InNet('Galena_2_0V75')] p16: voltage=0.000
SupplyNets "Schematic Supply Nets_6" [InNet('PCB_CORE_0V75')] p17: voltage=0.000
SupplyNets "Schematic Supply Nets_5" [InNet('2.0V')] p18: voltage=0.000
SupplyNets "Schematic Supply Nets_4" [InNet('HDI0+')] p19: voltage=0.000
SupplyNets "Schematic Supply Nets_3" [InNet('PCB_ANA_0V75')] p20: voltage=0.000
SupplyNets "Schematic Supply Nets_2" [InNet('0.75V')] p21: voltage=0.000
SupplyNets "Schematic Supply Nets_1" [InNet('Galena_1_0V75')] p22: voltage=0.000
UnpouredPolygon UnpouredPolygon_1 [All] p1:
Width [All] p1: maxlimit=6 minlimit=0.1 preferedwidth=0.254 checkconnectedcopper=TRUE
23 further rules are at their usual default settings.

## Classes and differential pairs
component class U_ext_supplies: C1 C5 C6 C7 C8 C9 C10 C11 C96 C97 C98 C99 C100 C101 C102 C103 C104 C105 C106 C107 C108 C109 C110 C186 C189 C190 C193 C195 C214 C215 C221 C222 C223 C224 C225 C226 C227 C228 C229 C230 C231 C232 C233 C234 C235 C236 C244 C245 C246 C247 C248 C249 C250 C251 GND1 GND2 GND3 GND4 P_3.3V_EXT P_5V P_9V P_CORE P_GALENA1 P_GALENA2 P_GND1 P_IO P_m3V P_PLL U1 U52 U53 U54 U55 U56 U57 U58 U59 VDD1 VDD5V VDD9V VDDA1 VDDA2 VDDC VDDIO VPLL VSSm3V
component class PCB_POWEER: 3V3 9V 10V 12 13 C12 C13 C14 C15 C16 C17 C18 C19 C20 C21 C22 C23 C24 C25 C26 C27 C28 C29 C30 C31 C32 C33 C34 C35 C36 C37 C38 C39 C40 C41 C42 C43 C44 C45 C46 C47 C48 C49 C50 C51 C52 C53 C54 C55 C56 C57 C58 C59 C60 C61 C111 C112 C113 C114 C209 C237 C238 C239 C240 C241 D1 D2 L1 L2 m3V m5V R3 R4 R5 R6 R7 R8 R9 R10 R11 R12 R13 R14 R15 R16 R17 R18 R19 R20 R21 R22 R23 R24 R25 R26 R27 R28 R29 R30 R47 R48 R49 R50 R71 R72 R73 R74 R75 R76 U2 U3 U4 U5 U6 U7 U8 U9 U21 U31
channel class source_iref_gen: source_iref1 source_iref2 source_iref3 source_iref4 source_iref5 source_iref_01 source_iref_02 source_iref_03 source_iref_04
channel class sink_iref_gen: U_sink_iref_gen1 U_sink_iref_gen2 U_sink_iref_gen3 U_sink_iref_gen4 U_sink_iref_gen5
channel class select_load: SelLoad1 SelLoad2 SelLoad3 SelLoad4 SelLoad5 SelLoad6 SelLoad7 SelLoad8
component class USB_DATA: C62 C63 C64 C65 C66 C67 C68 C69 C70 C71 C72 C73 C74 C75 C76 C77 C78 C79 C80 C81 C82 C83 C84 C85 C86 C87 C88 C89 C90 C91 C92 FB2 FB3 R31 R32 R33 R34 R35 R36 R37 U10 U11 U12 U13 U14 U15 U16 U17 U18 U19 Y1
component class U_sink_iref_gen5: C242_u_sink_iref_gen5 U6_U_sink_iref_gen5
component class U_sink_iref_gen4: C242_U_sink_iref_gen4 U6_U_sink_iref_gen4
component class U_sink_iref_gen3: C242_u_sink_iref_gen3 U6_U_sink_iref_gen3
component class U_sink_iref_gen2: C242_u_sink_iref_gen2 U6_U_sink_iref_gen2
component class U_sink_iref_gen1: C242_u_sink_iref_gen1 U6_U_sink_iref_gen1
component class U_pga_zif: C115 C116 C117 C118 C119 C120 C121 C122 C123 C124 C125 C126 C127 C128 C129 C130 C131 C132 C133 C134 C135 C136 C137 C138 C139 C140 C141 C142 C143 C144 C145 C146 C147 C148 C149 C150 C151 C152 C153 C154 C155 C156 C157 C158 C159 C160 C161 C162 C163 C164 C165 C166 C167 C168 C169 C170 C171 C172 C173 C174 C175 C176 C177 C178 C179 C180 C181 C182 C183 C184 C185 "CLK _O" J2
component class U_fmc_connections: C187 C188 C191 C192 C194 C196 C199 C201 C203 FMC1 R1 R39 R40 R41 R42 R43 R44 R77 R78 R80 R81 R82 R83 R84 R85 R86 R87 R88 R89 R90 R91 U24 U25 U28
component class U_digital_socket: E1 E2 J3 J4 PDO PFB R2 R79
component class U_analog_refs: C204 C205 C206 C207 C208 GV0 GV1 HD0 HD1 HDL0 HDL1 HU0 HU1 HUL0 HUL1 J5 J6 J7 JD0 JD1 JDL0 JDL1 JU0 JU1 JUL0 JUL1 PIR PIRL PLLV R45 R51 R52 R53 R54 R55 R56 R57 R58 R59 R60 R61 R62 R63 R64 R65 R66 R67 R68 U29 U30 U32 U33 U34 U35 U36 U37 U38 U39 U40 U41 U42 U43 U44 U45 U46 U47 U48 U49
component class source_iref_04: C2_source_iref_04 C216_source_iref_04 C243_source_iref_04 R7_source_iref_04 R8_source_iref_04 U8_04 U8_source_iref_04 U9_04 U9_source_iref_04 U22_source_iref_04
component class source_iref_03: C2_source_iref_03 C216_source_iref_03 C243_source_iref_03 R7_source_iref_03 R8_source_iref_03 U8_source_iref_03 U9_source_iref_03 U22_source_iref_03
component class source_iref_02: C2_source_iref_02 C216_source_iref_02 C243_source_iref_02 R7_source_iref_02 R8_source_iref_02 U8_source_iref_02 U9_source_iref_02 U22_source_iref_02
component class source_iref_01: C2_source_iref_01 C216_source_iref_01 C243_source_iref_01 R7_source_iref_01 R8_source_iref_01 U8_source_iref_01 U9_source_iref_01 U22_source_iref_01
component class source_iref5: C2_source_iref5 C216_source_iref5 C243_source_iref5 R7_source_iref5 R8_source_iref5 U8_source_iref5 U9_source_iref5 U22_source_iref5
component class source_iref4: C2_source_iref4 C216_source_iref4 C243_source_iref4 R7_source_iref4 R8_source_iref4 U8_source_iref4 U9_source_iref4 U22_source_iref4
component class source_iref3: C2_source_iref3 C216_source_iref3 C243_source_iref3 R7_source_iref3 R8_source_iref3 U8_source_iref3 U9_source_iref3 U22_source_iref3
component class source_iref2: C2_source_iref2 C216_source_iref2 C243_source_iref2 R7_source_iref2 R8_source_iref2 U8_source_iref2 U9_source_iref2 U22_source_iref2
component class source_iref1: C2_source_iref1 C216_source_iref1 C243_source_iref1 R7_source_iref1 R8_source_iref1 U8_source_iref1 U9_source_iref1 U22_source_iref1
component class SelLoad8: C220_SelLoad8 R3_SelLoad8 R4_SelLoad8 R5_SelLoad8 R6_SelLoad8 U5_SelLoad8
component class SelLoad7: C220_SelLoad7 R3_SelLoad7 R4_SelLoad7 R5_SelLoad7 R6_SelLoad7 U5_SelLoad7
component class SelLoad6: C220_SelLoad6 R3_SelLoad6 R4_SelLoad6 R5_SelLoad6 R6_SelLoad6 U5_SelLoad6
component class SelLoad5: C220_SelLoad5 R3_SelLoad5 R4_SelLoad5 R5_SelLoad5 R6_SelLoad5 U5_SelLoad5
component class SelLoad4: C220_SelLoad4 R3_SelLoad4 R4_SelLoad4 R5_SelLoad4 R6_SelLoad4 U5_SelLoad4
component class SelLoad3: C220_SelLoad3 R3_SelLoad3 R4_SelLoad3 R5_SelLoad3 R6_SelLoad3 U5_SelLoad3
component class SelLoad2: C220_SelLoad2 R3_SelLoad2 R4_SelLoad2 R5_SelLoad2 R6_SelLoad2 U5_SelLoad2
component class SelLoad1: C220_SelLoad1 R3_SelLoad1 R4_SelLoad1 R5_SelLoad1 R6_SelLoad1 U5_SelLoad1
component class PCB_CLKGEN: C93 C94 C95 C210 C211 C212 C213 J8 J9 J10 R38 R46 U20 U50 XTAL1 Y2
component class main: 1 3P3 5V_ext 9V_ext C3 C4 FB1 J1 m3_ext P_CORE1 P_IO1 R69 R70 U51
differential pair D: +D_P -D_N

## Components (designator, comment, footprint, x,y, rotation, side; value= is the part's Value field where it differs from the comment)
1 "Test pad" "Test Pad"#1 185.659,167.225 r90 top
3P3 "Test pad" "Test Pad"#2 194.514,159.425 r270 top
3V3 "Test pad" "Test Pad"#2 194.775,177.625 r0 top
9V "Test pad" "Test Pad"#3 76.439,172.55 r270 top
10V "Test pad" "Test Pad"#2 93.574,165.9 r270 top
12 "Test pad" "Test Pad"#2 116.672,158.378 r0 top locked
13 "Test pad" "Test Pad"#2 181.325,169.65 r270 top
C1 "100 µF" "CAP POL 1411_3528" 184.425,122.975 r180 bottom
C2_source_iref1 "100 pF" "CAP 0805_2012" 78.033,70.62 r270 bottom (schematic designator C2)
C2_source_iref2 "100 pF" "CAP 0805_2012" 99.658,70.62 r270 bottom (schematic designator C2)
C2_source_iref3 "100 pF" "CAP 0805_2012" 121.533,70.62 r270 bottom (schematic designator C2)
C2_source_iref4 "100 pF" "CAP 0805_2012" 143.183,70.62 r270 bottom (schematic designator C2)
C2_source_iref5 "100 pF" "CAP 0805_2012" 164.908,70.62 r270 bottom (schematic designator C2)
C2_source_iref_01 "100 pF" "CAP 0805_2012" 88.233,70.62 r270 bottom (schematic designator C2)
C2_source_iref_02 "100 pF" "CAP 0805_2012" 109.983,70.62 r270 bottom (schematic designator C2)
C2_source_iref_03 "100 pF" "CAP 0805_2012" 131.658,70.617 r270 bottom (schematic designator C2)
C2_source_iref_04 "100 pF" "CAP 0805_2012" 153.358,70.62 r270 bottom (schematic designator C2)
C3 "10000 pF" "CAP 0805_2012" 188.684,143.072 r180 bottom
C4 "10000 pF" "CAP 0805_2012" 188.675,148.05 r0 bottom
C5 "100 µF" "CAP POL 1411_3528" 138.758,200.94 r90 bottom locked
C6 "100 µF" "CAP POL 1411_3528" 135.083,200.94 r90 bottom locked
C7 "470 µF" "CAP POL 2917_7343" 129.358,196.789 r90 bottom locked
C8 "100 µF" "CAP POL 1411_3528" 105.547,200.94 r90 bottom locked
C9 "100 µF" "CAP POL 1411_3528" 109.222,200.94 r90 bottom locked
C10 "470 µF" "CAP POL 2917_7343" 99.322,178.84 r180 bottom locked
C11 "470 µF" "CAP POL 2917_7343" 128.983,178.84 r180 bottom locked
C12 "10 µF" "CAP 0805_2012" 131.958,168.39 r270 top locked
C13 "4.7 µF" "CAP 0805_2012" 119.492,166.04 r90 bottom locked
C14 "4.7 µF" "CAP 0805_2012" 121.522,166.04 r90 bottom locked
C15 "1 µF" "CAP 0805_2012" 120.337,168.685 r180 bottom locked
C16 "0.1 µF" "CAP 0805_2012" 111.472,166.99 r270 top
C17 "4.7 µF" "CAP 0805_2012" 111.472,166.99 r270 bottom
C18 "4.7 µF" "CAP 0805_2012" 112.237,164.21 r180 bottom
C19 "1 µF" "CAP 0805_2012" 112.247,164.215 r0 top
C20 "0.1 µF" "CAP 0805_2012" 109.447,166.99 r270 top locked
C21 "4.7 µF" "CAP 0805_2012" 134.29,165.271 r270 top locked
C22 "1 µF" "CAP 0805_2012" 139.515,166.221 r0 top locked
C23 "22µF" "CAP 0805_2012" 139.515,170.421 r180 top locked
C24 "2.2 µF" "CAP 0805_2012" 139.505,168.323 r180 top locked
C25 "0.1 µF" "CAP 0805_2012" 115.85,163.125 r180 top
C26 "100 µF" "CAP 0805_2012" 115.847,163.164 r0 bottom
C27 "100 µF" "CAP 0805_2012" 119.472,163.14 r180 bottom locked
C28 "1 µF" "CAP 0805_2012" 139.465,157.846 r0 top locked
C29 "2.2 µF" "CAP 0805_2012" 120.547,163.164 r180 top locked
C30 "22µF" "CAP 0805_2012" 139.49,159.896 r180 top locked
C31 "2.2 µF" "CAP 0805_2012" 139.49,161.971 r180 top locked
C32 "0.068 µF" "CAP 0805_2012" 114.372,170.79 r270 top locked
C33 "10 µF" "CAP 0805_2012" 178.225,170.325 r90 top
C34 "4.7 µF" "CAP 0805_2012" 188.22,164.561 r0 bottom
C35 "4.7 µF" "CAP 0805_2012" 188.27,162.536 r0 bottom
C36 "1 µF" "CAP 0805_2012" 190.921,163.736 r90 bottom
C37 "0.1 µF" "CAP 0805_2012" 189.196,172.586 r180 top
C38 "4.7 µF" "CAP 0805_2012" 189.146,172.586 r180 bottom
C39 "4.7 µF" "CAP 0805_2012" 186.446,171.836 r90 bottom
C40 "1 µF" "CAP 0805_2012" 186.471,171.936 r90 top
C41 "0.1 µF" "CAP 0805_2012" 189.271,174.661 r180 top
C42 "4.7 µF" "CAP 0805_2012" 176.375,165.875 r180 top
C43 "1 µF" "CAP 0805_2012" 173.8,173.175 r90 top
C44 "22µF" "CAP 0805_2012" 170.655,170.2 r0 top
C45 "2.2 µF" "CAP 0805_2012" 170.65,168.125 r0 top
C46 "0.1 µF" "CAP 0805_2012" 185.371,168.386 r90 top
C47 "10 µF" "CAP 0805_2012" 148.052,169.018 r270 top locked
C48 "100 µF" "CAP 0805_2012" 185.371,168.261 r270 bottom
C49 "2.2 µF" "CAP 0805_2012" 185.396,163.511 r90 top
C50 "4.7 µF" "CAP 0805_2012" 150.427,165.418 r270 top locked
C51 "1 µF" "CAP 0805_2012" 155.587,167.133 r0 top locked
C52 "0.068 µF" "CAP 0805_2012" 193.021,169.711 r180 top
C53 "2.2 µF" "CAP 0805_2012" 155.587,169.165 r180 top locked
C54 "22µF" "CAP 0805_2012" 155.587,171.197 r180 top locked
C55 "1 µF" "CAP 0805_2012" 155.46,158.116 r0 top locked
C56 "2.2 µF" "CAP 0805_2012" 155.46,160.275 r180 top locked
C57 "22µF" "CAP 0805_2012" 155.46,162.307 r180 top locked
C58 "10 µF" "CAP 0805_2012" 194.466,190.82 r0 bottom
C59 "10000 pF" "CAP 0805_2012" 194.466,192.979 r0 bottom
C60 "10 µF" "CAP 0805_2012" 190.656,190.82 r180 bottom
C61 "10000 pF" "CAP 0805_2012" 190.656,192.979 r180 bottom
C62 "4.7 µF" "CAP 0805_2012" 183.589,146.875 r270 bottom
C63 "CSMD402/100nF" "smd C0402" 181.95,146.6 r270 bottom
C64 "CSMD402/100nF" "smd C0402" 175.825,148.95 r180 bottom
C65 "CSMD402/100nF" "smd C0402" 180.375,142.125 r0 bottom
C66 "CSMD402/100nF" "smd C0402" 180.05,148.975 r180 bottom
C67 "CSMD402/100nF" "smd C0402" 168.15,155.525 r90 bottom
C68 "CSMD402/100nF" "smd C0402" 170.125,155.525 r90 bottom
C69 "CSMD402/100nF" "smd C0402" 168.15,152.583 r90 bottom
C70 "CSMD402/100nF" "smd C0402" 170.125,152.583 r90 bottom
C71 "CSMD402/100nF" "smd C0402" 168.15,149.642 r90 bottom
C72 "CSMD402/100nF" "smd C0402" 170.125,149.642 r90 bottom
C73 "CSMD402/100nF" "smd C0402" 168.15,146.7 r90 bottom
C74 "CSMD402/100nF" "smd C0402" 170.125,146.7 r90 bottom
C75 "CSMD402/100nF" "smd C0402" 174.575,145.675 r0 bottom
C76 "CSMD402/100nF" "smd C0402" 177.6,142.15 r0 bottom
C77 "CSMD402/100nF" "smd C0402" 180.05,150.05 r0 bottom
C78 "CSMD402/100nF" "smd C0402" 175.85,150.025 r180 bottom
C79 "4.7 µF" "CAP 0805_2012" 183.589,143.25 r90 bottom
C80 "CSMD402/100nF" "smd C0402" 181.975,144.1 r270 bottom
C81 "CSMD402/100nF" "smd C0402" 175.475,142.925 r270 bottom
C82 "CSMD402/100nF" "smd C0402" 168.15,143.725 r90 bottom
C83 "CSMD402/100nF" "smd C0402" 170.125,143.725 r90 bottom
C84 "CSMD402/100nF" "smd C0402" 168.15,140.725 r90 bottom
C85 "CSMD402/100nF" "smd C0402" 170.125,140.725 r90 bottom
C86 "CSMD402/100nF" "smd C0402" 168.15,137.825 r90 bottom
C87 "CSMD402/100nF" "smd C0402" 170.125,137.825 r90 bottom
C88 "CSMD402/100nF" "smd C0402" 168.15,134.8 r90 bottom
C89 "CSMD402/100nF" "smd C0402" 170.125,134.8 r90 bottom
C90 "4.7 µF" "CAP 0805_2012" 174,143.4 r270 bottom
C91 "27 pF" "CAP 0805_2012" 185.15,135.4 r90 bottom
C92 "27 pF" "CAP 0805_2012" 187.325,135.4 r90 bottom
C93 "12 pF" "CAP 0805_2012" 106.467,131.315 r180 bottom
C94 "12 pF" "CAP 0805_2012" 106.532,135.34 r180 bottom
C95 "10000 pF" "CAP 0805_2012" 106.542,129.34 r180 bottom
C96 "100 µF" "CAP POL 1411_3528" 135.083,190.464 r270 bottom locked
C97 "100 µF" "CAP POL 1411_3528" 138.758,190.464 r270 bottom locked
C98 "470 µF" "CAP POL 2917_7343" 99.772,196.789 r90 bottom locked
C99 "100 µF" "CAP POL 1411_3528" 105.547,190.464 r270 bottom locked
C100 "100 µF" "CAP POL 1411_3528" 109.222,190.464 r270 bottom locked
C101 "100 µF" "CAP POL 1411_3528" 120.297,200.94 r90 bottom locked
C102 "100 µF" "CAP POL 1411_3528" 123.972,200.94 r90 bottom locked
C103 "470 µF" "CAP POL 2917_7343" 114.522,196.789 r90 bottom locked
C104 "100 µF" "CAP POL 1411_3528" 150.017,200.94 r90 bottom locked
C105 "100 µF" "CAP POL 1411_3528" 153.692,200.94 r90 bottom locked
C106 "470 µF" "CAP POL 2917_7343" 144.267,196.789 r90 bottom locked
C107 "470 µF" "CAP POL 2917_7343" 114.147,178.84 r180 bottom locked
C108 "100 µF" "CAP POL 1411_3528" 120.297,190.464 r270 bottom locked
C109 "100 µF" "CAP POL 1411_3528" 123.972,190.464 r270 bottom locked
C110 "470 µF" "CAP POL 2917_7343" 143.817,178.84 r180 bottom locked
C111 "10 µF" "CAP 0805_2012" 99.372,174.029 r0 top
C112 "10 µF" "CAP 0805_2012" 99.374,176.2 r180 top
C113 "10 µF" "CAP 0805_2012" 96.6,162.85 r90 top
C114 "10 µF" "CAP 0805_2012" 98.8,162.85 r90 top
C115 "0.1 µF" "CAP 0805_2012" 156.019,129.832 r180 bottom
C116 "2.2 µF" "CAP 0805_2012" 156.019,131.936 r180 bottom
C117 "0.1 µF" "CAP 0805_2012" 156.017,119.414 r180 bottom
C118 "2.2 µF" "CAP 0805_2012" 155.992,121.464 r180 bottom
C119 "0.1 µF" "CAP 0805_2012" 130.242,139.364 r270 bottom
C120 "2.2 µF" "CAP 0805_2012" 128.267,139.364 r270 bottom
C121 "0.1 µF" "CAP 0805_2012" 133.043,102.812 r90 bottom
C122 "2.2 µF" "CAP 0805_2012" 135.147,102.812 r90 bottom
C123 "0.1 µF" "CAP 0805_2012" 143.354,102.841 r90 bottom
C124 "2.2 µF" "CAP 0805_2012" 141.275,102.841 r90 bottom
C125 "0.1 µF" "CAP 0805_2012" 117.999,106.238 r90 bottom
C126 "2.2 µF" "CAP 0805_2012" 120.103,106.238 r90 bottom
C127 "10000 pF" "CAP 0805_2012" 156.019,135.406 r180 bottom
C128 "0.1 µF" "CAP 0805_2012" 156.019,137.451 r180 bottom
C129 "10000 pF" "CAP 0805_2012" 156.019,124.442 r180 bottom
C130 "0.1 µF" "CAP 0805_2012" 156.019,126.513 r180 bottom
C131 "10000 pF" "CAP 0805_2012" 158.344,103.129 r180 bottom
C132 "0.1 µF" "CAP 0805_2012" 158.344,105.176 r180 bottom
C133 "10000 pF" "CAP 0805_2012" 153.25,139.375 r270 bottom
C134 "0.1 µF" "CAP 0805_2012" 151.325,139.375 r270 bottom
C135 "10000 pF" "CAP 0805_2012" 122.267,102.789 r90 bottom
C136 "0.1 µF" "CAP 0805_2012" 124.458,102.812 r90 bottom
C137 "10000 pF" "CAP 0805_2012" 120.103,110.991 r270 bottom
C138 "0.1 µF" "CAP 0805_2012" 117.999,110.991 r270 bottom
C139 "10000 pF" "CAP 0805_2012" 142.192,139.389 r270 bottom
C140 "0.1 µF" "CAP 0805_2012" 140.192,139.364 r270 bottom
C141 "10000 pF" "CAP 0805_2012" 122.192,139.364 r270 bottom
C142 "0.1 µF" "CAP 0805_2012" 120.192,139.364 r270 bottom
C143 "1000 pF" "CAP 0805_2012" 133.043,152.814 r90 top
C144 "1000 pF" "CAP 0805_2012" 139.592,152.764 r270 top
C145 "10000 pF" "CAP 0805_2012" 126.217,139.364 r270 bottom
C146 "0.1 µF" "CAP 0805_2012" 124.217,139.364 r270 bottom
C147 "10000 pF" "CAP 0805_2012" 119.265,128.039 r0 bottom
C148 "0.1 µF" "CAP 0805_2012" 119.265,126.019 r0 bottom
C149 "10000 pF" "CAP 0805_2012" 119.265,132.268 r0 bottom
C150 "0.1 µF" "CAP 0805_2012" 119.265,130.089 r0 bottom
C151 "10000 pF" "CAP 0805_2012" 119.265,136.708 r0 bottom
C152 "0.1 µF" "CAP 0805_2012" 119.265,134.528 r0 bottom
C153 "10000 pF" "CAP 0805_2012" 134.217,139.389 r270 bottom
C154 "0.1 µF" "CAP 0805_2012" 132.21,139.391 r270 bottom
C155 "10000 pF" "CAP 0805_2012" 136.217,139.389 r270 bottom
C156 "0.1 µF" "CAP 0805_2012" 138.242,139.389 r270 bottom
C157 "10000 pF" "CAP 0805_2012" 125.92,173.889 r90 bottom locked
C158 "0.1 µF" "CAP 0805_2012" 123.462,173.889 r90 bottom locked
C159 "10000 pF" "CAP 0805_2012" 121.004,173.889 r90 bottom locked
C160 "0.1 µF" "CAP 0805_2012" 118.546,173.889 r90 bottom locked
C161 "1000 pF" "CAP 0805_2012" 135.242,152.764 r90 top
C162 "10000 pF" "CAP 0805_2012" 145.392,102.839 r90 bottom
C163 "0.1 µF" "CAP 0805_2012" 147.392,102.839 r90 bottom
C164 "10000 pF" "CAP 0805_2012" 149.441,102.837 r90 bottom
C165 "0.1 µF" "CAP 0805_2012" 151.442,102.864 r90 bottom
C166 "10000 pF" "CAP 0805_2012" 153.442,102.864 r90 bottom
C167 "0.1 µF" "CAP 0805_2012" 155.442,102.864 r90 bottom
C168 "10000 pF" "CAP 0805_2012" 155.969,107.179 r180 bottom
C169 "0.1 µF" "CAP 0805_2012" 155.969,109.226 r180 bottom
C170 "10000 pF" "CAP 0805_2012" 155.993,111.304 r180 bottom
C171 "0.1 µF" "CAP 0805_2012" 155.993,113.351 r180 bottom
C172 "10000 pF" "CAP 0805_2012" 155.992,115.379 r180 bottom
C173 "0.1 µF" "CAP 0805_2012" 155.992,117.426 r180 bottom
C174 "10000 pF" "CAP 0805_2012" 154.842,173.889 r90 bottom locked
C175 "0.1 µF" "CAP 0805_2012" 152.384,173.889 r90 bottom locked
C176 "10000 pF" "CAP 0805_2012" 149.926,173.889 r90 bottom locked
C177 "0.1 µF" "CAP 0805_2012" 147.468,173.889 r90 bottom locked
C178 "1000 pF" "CAP 0805_2012" 137.492,152.764 r270 top
C179 "1000 pF" "CAP 0805_2012" 133.3,100.15 r90 top
C180 "10000 pF" "CAP 0805_2012" 107.775,172.7 r180 bottom locked
C181 "0.1 µF" "CAP 0805_2012" 107.85,174.85 r180 bottom
C182 "1000 pF" "CAP 0805_2012" 137.817,100.164 r270 top
C183 "1000 pF" "CAP 0805_2012" 140.042,100.164 r270 top
C184 "1000 pF" "CAP 0805_2012" 135.575,100.175 r90 top
C185 "1000 pF" "CAP 0805_2012" 142.217,100.164 r90 top
C186 "100 µF" "CAP POL 1411_3528" 184.425,119.3 r180 bottom
C187 "0.1 µF" "CAP 0805_2012" 114.692,115.389 r0 top
C188 "0.1 µF" "CAP 0805_2012" 115.567,112.489 r270 top
C189 "470 µF" "CAP POL 2917_7343" 172.8,128.825 r90 bottom
C190 "470 µF" "CAP POL 2917_7343" 190.75,128.75 r0 bottom
C191 "0.1 µF" "CAP 0805_2012" 113.492,112.464 r270 top
C192 "0.1 µF" "CAP 0805_2012" 40.025,140.925 r0 top
C193 "100 µF" "CAP POL 1411_3528" 194.9,122.975 r0 bottom
C194 "0.1 µF" "CAP 0805_2012" 40,138.85 r0 top
C195 "100 µF" "CAP POL 1411_3528" 194.9,119.3 r0 bottom
C196 "0.1 µF" "CAP 0805_2012" 40.225,131.175 r180 top
C199 "0.1 µF" "CAP 0805_2012" 37.15,101.65 r0 top
C201 "0.1 µF" "CAP 0805_2012" 31.425,111.825 r180 top
C203 "0.1 µF" "CAP 0805_2012" 35.325,111.825 r0 top
C204 "10 µF" "CAP 0805_2012" 97.325,90.05 r0 top
C205 "0.1 µF" "CAP 0805_2012" 101.625,90.05 r180 top
C206 "100 pF" "CAP 0805_2012" 99.8,134.625 r180 bottom
C207 "100 pF" "CAP 0805_2012" 92,92.125 r90 top
C208 "100 pF" "CAP 0805_2012" 93.975,92.15 r90 top
C209 "10 µF" "CAP 0805_2012" 101.785,162.853 r90 top
C210 "12 pF" "CAP 0805_2012" 115.392,136.439 r270 bottom
C211 "0.1 µF" "CAP 0805_2012" 113.342,131.789 r0 bottom
C212 "0.1 µF" "CAP 0805_2012" 113.242,136.389 r270 bottom
C213 "0.1 µF" "CAP 0805_2012" 116.167,130.964 r270 bottom
C214 "100 µF" "CAP POL 1411_3528" 150.017,190.464 r270 bottom locked
C215 "100 µF" "CAP POL 1411_3528" 153.692,190.464 r270 bottom locked
C216_source_iref1 "0.1 µF" "CAP 0805_2012" 77.575,65.85 r0 bottom (schematic designator C216)
C216_source_iref2 "0.1 µF" "CAP 0805_2012" 99.2,65.85 r0 bottom (schematic designator C216)
C216_source_iref3 "0.1 µF" "CAP 0805_2012" 121.075,65.85 r0 bottom (schematic designator C216)
C216_source_iref4 "0.1 µF" "CAP 0805_2012" 142.725,65.85 r0 bottom (schematic designator C216)
C216_source_iref5 "0.1 µF" "CAP 0805_2012" 164.45,65.85 r0 bottom (schematic designator C216)
C216_source_iref_01 "0.1 µF" "CAP 0805_2012" 87.775,65.85 r0 bottom (schematic designator C216)
C216_source_iref_02 "0.1 µF" "CAP 0805_2012" 109.525,65.85 r0 bottom (schematic designator C216)
C216_source_iref_03 "0.1 µF" "CAP 0805_2012" 131.201,65.848 r0 bottom (schematic designator C216)
C216_source_iref_04 "0.1 µF" "CAP 0805_2012" 152.9,65.85 r0 bottom (schematic designator C216)
C220_SelLoad1 "0.1 µF" "CAP 0805_2012" 50.85,114.375 r270 bottom (schematic designator C220)
C220_SelLoad2 "0.1 µF" "CAP 0805_2012" 50.825,123.675 r270 bottom (schematic designator C220)
C220_SelLoad3 "0.1 µF" "CAP 0805_2012" 50.825,104.875 r270 bottom (schematic designator C220)
C220_SelLoad4 "0.1 µF" "CAP 0805_2012" 60.175,104.275 r270 bottom (schematic designator C220)
C220_SelLoad5 "0.1 µF" "CAP 0805_2012" 79.475,105.225 r270 bottom (schematic designator C220)
C220_SelLoad6 "0.1 µF" "CAP 0805_2012" 69.75,104.275 r270 bottom (schematic designator C220)
C220_SelLoad7 "0.1 µF" "CAP 0805_2012" 79.25,124.225 r270 bottom (schematic designator C220)
C220_SelLoad8 "0.1 µF" "CAP 0805_2012" 79.3,114.775 r270 bottom (schematic designator C220)
C221 "100 µF" "CAP POL 1411_3528" 164.825,200.95 r90 bottom
C222 "100 µF" "CAP POL 1411_3528" 168.5,200.95 r90 bottom
C223 "470 µF" "CAP POL 2917_7343" 159.075,196.8 r90 bottom
C224 "100 µF" "CAP POL 1411_3528" 179.7,190.475 r270 bottom
C225 "100 µF" "CAP POL 1411_3528" 183.375,190.475 r270 bottom
C226 "470 µF" "CAP POL 2917_7343" 173.85,178.85 r180 bottom
C227 "470 µF" "CAP POL 2917_7343" 158.875,178.85 r180 bottom
C228 "100 µF" "CAP POL 1411_3528" 164.825,190.475 r270 bottom
C229 "100 µF" "CAP POL 1411_3528" 168.5,190.475 r270 bottom
C230 "470 µF" "CAP POL 2917_7343" 173.925,196.8 r90 bottom
C231 "100 µF" "CAP POL 1411_3528" 179.7,200.95 r90 bottom
C232 "100 µF" "CAP POL 1411_3528" 183.375,200.95 r90 bottom
C233 "100 µF" "CAP POL 1411_3528" 75.949,190.475 r270 bottom
C234 "100 µF" "CAP POL 1411_3528" 79.624,190.475 r270 bottom
C235 "470 µF" "CAP POL 2917_7343" 70.174,196.8 r90 bottom
C236 "100 µF" "CAP POL 1411_3528" 90.583,190.439 r270 bottom
C237 "10 µF" "CAP 0805_2012" 78.363,167.037 r270 top
C238 "10000 pF" "CAP 0805_2012" 80.437,167.013 r270 top
C239 "10000 pF" "CAP 0805_2012" 89.112,168.962 r270 top
C240 "10 µF" "CAP 0805_2012" 88.712,172.812 r270 top
C241 "10000 pF" "CAP 0805_2012" 84.563,172.688 r270 top
C242_u_sink_iref_gen1 "0.1 µF" "CAP 0805_2012" 75.8,79.55 r0 bottom (schematic designator C242)
C242_u_sink_iref_gen2 "0.1 µF" "CAP 0805_2012" 97.4,79.525 r0 bottom (schematic designator C242)
C242_u_sink_iref_gen3 "0.1 µF" "CAP 0805_2012" 119.275,79.55 r0 bottom (schematic designator C242)
C242_U_sink_iref_gen4 "0.1 µF" "CAP 0805_2012" 140.925,79.525 r0 bottom (schematic designator C242)
C242_u_sink_iref_gen5 "0.1 µF" "CAP 0805_2012" 162.65,79.525 r0 bottom (schematic designator C242)
C243_source_iref1 "0.1 µF" "CAP 0805_2012" 77.55,63.675 r0 bottom (schematic designator C243)
C243_source_iref2 "0.1 µF" "CAP 0805_2012" 99.175,63.675 r0 bottom (schematic designator C243)
C243_source_iref3 "0.1 µF" "CAP 0805_2012" 121.05,63.675 r0 bottom (schematic designator C243)
C243_source_iref4 "0.1 µF" "CAP 0805_2012" 142.7,63.675 r0 bottom (schematic designator C243)
C243_source_iref5 "0.1 µF" "CAP 0805_2012" 164.425,63.675 r0 bottom (schematic designator C243)
C243_source_iref_01 "0.1 µF" "CAP 0805_2012" 87.75,63.675 r0 bottom (schematic designator C243)
C243_source_iref_02 "0.1 µF" "CAP 0805_2012" 109.5,63.675 r0 bottom (schematic designator C243)
C243_source_iref_03 "0.1 µF" "CAP 0805_2012" 131.176,63.673 r0 bottom (schematic designator C243)
C243_source_iref_04 "0.1 µF" "CAP 0805_2012" 152.875,63.675 r0 bottom (schematic designator C243)
C244 "100 µF" "CAP POL 1411_3528" 94.258,190.439 r270 bottom
C245 "470 µF" "CAP POL 2917_7343" 84.883,196.764 r90 bottom
C246 "470 µF" "CAP POL 2917_7343" 69.874,178.85 r180 bottom
C247 "100 µF" "CAP POL 1411_3528" 75.949,200.95 r90 bottom
C248 "100 µF" "CAP POL 1411_3528" 79.624,200.95 r90 bottom
C249 "470 µF" "CAP POL 2917_7343" 84.333,178.864 r180 bottom
C250 "100 µF" "CAP POL 1411_3528" 94.258,200.914 r90 bottom
C251 "100 µF" "CAP POL 1411_3528" 90.583,200.914 r90 bottom
"CLK _O" "Test pad" "Test Pad"#2 115.361,148.475 r90 top
D1 "ES2A" "DO214AA SMB" 101.531,168.774 r90 bottom
D2 "ES2A" "DO214AA SMB" 97.34,168.743 r270 bottom
E1 "1-1478979-0" TE_1-1478979-0 119.525,96.875 r0 top
E2 "1-1478979-0" TE_1-1478979-0 107.55,149.75 r0 top
FB1 "600 Ohms @ 100 MHz" "FER 0805_2012" 188.675,146.075 r180 bottom
FB2 "600 Ohms @ 100 MHz" "FER 0805_2012" 185.764,146.8 r270 bottom
FB3 "600 Ohms @ 100 MHz" "FER 0805_2012" 185.764,143.205 r90 bottom
FMC1 "" SAMTEC_ASP-134604-01 35.687,129.667 r90 bottom locked
GND1 "Test pad" "Test Pad"#2 62.699,177.625 r90 top
GND2 "Test pad" "Test Pad"#2 194.725,134.25 r90 top
GND3 "Test pad" "Test Pad"#2 62.699,65.697 r90 top
GND4 "Test pad" "Test Pad"#4 194.725,65.697 r90 top
GV0 "Test pad" "Test Pad"#2 96.2,140.039 r0 top
GV1 "Test pad" "Test Pad"#5 -85.65,104.314 r0 top
HD0 "Test pad" "Test Pad"#2 178.1,96.414 r0 top
HD1 "Test pad" "Test Pad"#2 178.1,84.375 r0 top
HDL0 "Test pad" "Test Pad"#2 88.65,108.114 r0 top
HDL1 "Test pad" "Test Pad"#2 46.5,117.261 r0 top
HU0 "Test pad" "Test Pad"#2 151.008,74.589 r0 top
HU1 "Test pad" "Test Pad"#2 107.633,74.589 r0 top
HUL0 "Test pad" "Test Pad"#2 69.325,101.039 r0 top
HUL1 "Test pad" "Test Pad"#2 46.5,126.551 r0 top
J1 "USB4085-GF-A" FP-USB4085-GF-A-MFG 195.541,145.265 r90 top
J2 "169-PRS13001-12" CONN_169-PRS13001-12_ARS 139.763,126.36 r0 top locked
J3 "61300311121" WURTH_61300311121 116.192,123.764 r270 top locked
J4 "61300311121" WURTH_61300311121 112.986,123.764 r270 top locked
J5 "61300311121" WURTH_61300311121 96.2,132.125 r90 top
J6 "877583016" CONN_SD-87758-107_30_MOL 185.654,106.327 r270 top
J7 "SBH11-PBPC-D13-ST-BK" CONN26_D13-ST-BK_SUL 193.655,107.948 r270 top
J8 "61300311121" WURTH_61300311121 109.83,123.764 r270 top
J9 "61300311121" WURTH_61300311121 106.624,123.764 r270 top
J10 "61300311121" WURTH_61300311121 103.417,123.764 r270 top
JD0 "Test pad" "Test Pad"#2 178.1,102.539 r0 top
JD1 "Test pad" "Test Pad"#2 178.1,90.314 r0 top
JDL0 "Test pad" "Test Pad"#2 88.65,127.1 r0 top
JDL1 "Test pad" "Test Pad"#2 58.4,101.039 r0 top
JU0 "Test pad" "Test Pad"#2 172.65,74.614 r0 top
JU1 "Test pad" "Test Pad"#2 129.308,74.589 r0 top
JUL0 "Test pad" "Test Pad"#2 88.65,117.614 r0 top
JUL1 "Test pad" "Test Pad"#2 46.5,107.789 r0 top
L1 "120 nH" "IND 0201_0603" 118.122,163.25 r270 top locked
L2 "330 nH" "Murata LQW15 0402" 185.371,166.011 r180 top
m3V "Test pad" "Test Pad"#2 93.239,172.125 r270 top
m5V "Test pad" "Test Pad"#2 105.725,170.275 r270 top
P_3.3V_EXT "FCR7350R" CONN1_FCR7350R_CLF 189.415,121.055 r90 top
P_5V "FCR7350R" CONN1_FCR7350R_CLF 181.349,195.441 r180 top locked
P_9V "FCR7350R" CONN1_FCR7350R_CLF 77.558,195.441 r180 top
P_CORE "FCR7350R" CONN1_FCR7350R_CLF 136.791,195.431 r180 top locked
P_GALENA1 "FCR7350R" CONN1_FCR7350R_CLF 121.971,195.431 r180 top locked
P_GALENA2 "FCR7350R" CONN1_FCR7350R_CLF 151.661,195.431 r180 top locked
P_GND1 "FCR7350R" CONN1_FCR7350R_CLF 62.738,195.441 r180 top locked
P_IO "FCR7350R" CONN1_FCR7350R_CLF 166.479,195.441 r180 top
P_m3V "FCR7350R" CONN1_FCR7350R_CLF 92.222,195.405 r180 top locked
P_PLL "FCR7350R" CONN1_FCR7350R_CLF 107.15,195.431 r180 top locked
PDO "Test pad" "Test Pad"#5 -73.25,95.464 r0 top
PFB "Test pad" "Test Pad"#2 126.842,99.228 r0 top
PIR "Test pad" "Test Pad"#2 85.993,74.574 r0 top
PIRL "Test pad" "Test Pad"#2 75.711,84.325 r90 top
PLLV "Test pad" "Test Pad"#2 96.111,125.875 r90 top
R1 "CRCW08050000ZSTA" RESC2012X50N 102.225,116.425 r0 bottom
R2 "CRCW060350R0FKEA" RESC1508X50N 114.7,96.1 r90 top
R3_SelLoad1 "1 MOhms" "YAGEO RES 0805_2012" 51.85,118.35 r180 bottom (schematic designator R3)
R3_SelLoad2 "1 MOhms" "YAGEO RES 0805_2012" 51.825,127.65 r180 bottom (schematic designator R3)
R3_SelLoad3 "1 MOhms" "YAGEO RES 0805_2012" 51.825,108.85 r180 bottom (schematic designator R3)
R3_SelLoad4 "1 MOhms" "YAGEO RES 0805_2012" 61.175,108.25 r180 bottom (schematic designator R3)
R3_SelLoad5 "1 MOhms" "YAGEO RES 0805_2012" 80.475,109.2 r180 bottom (schematic designator R3)
R3_SelLoad6 "1 MOhms" "YAGEO RES 0805_2012" 70.75,108.25 r180 bottom (schematic designator R3)
R3_SelLoad7 "1 MOhms" "YAGEO RES 0805_2012" 80.25,128.2 r180 bottom (schematic designator R3)
R3_SelLoad8 "1 MOhms" "YAGEO RES 0805_2012" 80.3,118.75 r180 bottom (schematic designator R3)
R4_SelLoad1 "100 kOhms" "RES 0805_2012" 51.9,120.3 r180 bottom (schematic designator R4)
R4_SelLoad2 "100 kOhms" "RES 0805_2012" 51.875,129.6 r180 bottom (schematic designator R4)
R4_SelLoad3 "100 kOhms" "RES 0805_2012" 51.875,110.8 r180 bottom (schematic designator R4)
R4_SelLoad4 "100 kOhms" "RES 0805_2012" 61.225,110.2 r180 bottom (schematic designator R4)
R4_SelLoad5 "100 kOhms" "RES 0805_2012" 80.525,111.15 r180 bottom (schematic designator R4)
R4_SelLoad6 "100 kOhms" "RES 0805_2012" 70.8,110.2 r180 bottom (schematic designator R4)
R4_SelLoad7 "100 kOhms" "RES 0805_2012" 80.3,130.15 r180 bottom (schematic designator R4)
R4_SelLoad8 "100 kOhms" "RES 0805_2012" 80.35,120.7 r180 bottom (schematic designator R4)
R5_SelLoad1 "10 kOhms" "RES 0805_2012" 55.3,116.125 r0 bottom (schematic designator R5)
R5_SelLoad2 "10 kOhms" "RES 0805_2012" 55.275,125.425 r0 bottom (schematic designator R5)
R5_SelLoad3 "10 kOhms" "RES 0805_2012" 55.275,106.625 r0 bottom (schematic designator R5)
R5_SelLoad4 "10 kOhms" "RES 0805_2012" 64.625,106.025 r0 bottom (schematic designator R5)
R5_SelLoad5 "10 kOhms" "RES 0805_2012" 83.925,106.975 r0 bottom (schematic designator R5)
R5_SelLoad6 "10 kOhms" "RES 0805_2012" 74.2,106.025 r0 bottom (schematic designator R5)
R5_SelLoad7 "10 kOhms" "RES 0805_2012" 83.7,125.975 r0 bottom (schematic designator R5)
R5_SelLoad8 "10 kOhms" "RES 0805_2012" 83.75,116.525 r0 bottom (schematic designator R5)
R6_SelLoad1 "1 kOhms" "RES 0805_2012" 55.325,114.15 r0 bottom (schematic designator R6)
R6_SelLoad2 "1 kOhms" "RES 0805_2012" 55.3,123.45 r0 bottom (schematic designator R6)
R6_SelLoad3 "1 kOhms" "RES 0805_2012" 55.3,104.65 r0 bottom (schematic designator R6)
R6_SelLoad4 "1 kOhms" "RES 0805_2012" 64.65,104.05 r0 bottom (schematic designator R6)
R6_SelLoad5 "1 kOhms" "RES 0805_2012" 83.95,105 r0 bottom (schematic designator R6)
R6_SelLoad6 "1 kOhms" "RES 0805_2012" 74.225,104.05 r0 bottom (schematic designator R6)
R6_SelLoad7 "1 kOhms" "RES 0805_2012" 83.725,124 r0 bottom (schematic designator R6)
R6_SelLoad8 "1 kOhms" "RES 0805_2012" 83.775,114.55 r0 bottom (schematic designator R6)
R7_source_iref1 "100 Ohms" "RES 0805_2012" 73.733,69.595 r0 bottom (schematic designator R7)
R7_source_iref2 "100 Ohms" "RES 0805_2012" 95.358,69.595 r0 bottom (schematic designator R7)
R7_source_iref3 "100 Ohms" "RES 0805_2012" 117.233,69.595 r0 bottom (schematic designator R7)
R7_source_iref4 "100 Ohms" "RES 0805_2012" 138.883,69.595 r0 bottom (schematic designator R7)
R7_source_iref5 "100 Ohms" "RES 0805_2012" 160.608,69.595 r0 bottom (schematic designator R7)
R7_source_iref_01 "100 Ohms" "RES 0805_2012" 83.933,69.595 r0 bottom (schematic designator R7)
R7_source_iref_02 "100 Ohms" "RES 0805_2012" 105.683,69.595 r0 bottom (schematic designator R7)
R7_source_iref_03 "100 Ohms" "RES 0805_2012" 127.358,69.592 r0 bottom (schematic designator R7)
R7_source_iref_04 "100 Ohms" "RES 0805_2012" 149.058,69.595 r0 bottom (schematic designator R7)
R8_source_iref1 "10 kOhms" "RES 0805_2012" 73.733,71.77 r180 bottom (schematic designator R8)
R8_source_iref2 "10 kOhms" "RES 0805_2012" 95.358,71.77 r180 bottom (schematic designator R8)
R8_source_iref3 "10 kOhms" "RES 0805_2012" 117.233,71.77 r180 bottom (schematic designator R8)
R8_source_iref4 "10 kOhms" "RES 0805_2012" 138.883,71.77 r180 bottom (schematic designator R8)
R8_source_iref5 "10 kOhms" "RES 0805_2012" 160.608,71.77 r180 bottom (schematic designator R8)
R8_source_iref_01 "10 kOhms" "RES 0805_2012" 83.933,71.77 r180 bottom (schematic designator R8)
R8_source_iref_02 "10 kOhms" "RES 0805_2012" 105.683,71.77 r180 bottom (schematic designator R8)
R8_source_iref_03 "10 kOhms" "RES 0805_2012" 127.358,71.767 r180 bottom (schematic designator R8)
R8_source_iref_04 "10 kOhms" "RES 0805_2012" 149.058,71.77 r180 bottom (schematic designator R8)
R9 "5.1 kOhms" "RES 0805_2012" 134.99,172.796 r0 top locked
R10 "2 mOhms" "RES 0805_2012" 139.54,172.521 r0 top locked
R11 "243 kOhms" "RES 0805_2012" 113.497,166.964 r270 top
R12 "10 kOhms" "RES 0805_2012" 116.422,170.94 r90 top locked
R13 "5.1 kOhms" "RES 0805_2012" 136.34,165.246 r270 top locked
R14 "15 kOhms" "RES 0805_2012" 133.715,157.071 r90 top locked
R15 "15 kOhms" "RES 0805_2012" 135.783,157.063 r90 top locked
R16 "10 kOhms" "RES 0805_2012" 119.575,165.975 r90 top
R17 "36 kOhms" "RES 0805_2012" 175.825,173.2 r270 top
R18 "2 mOhms" "RES 0805_2012" 139.465,164.096 r0 top locked
R19 "100 kOhms" "RES 0805_2012" 113.497,166.964 r90 bottom
R20 "10 kOhms" "RES 0805_2012" 115.547,170.79 r270 bottom locked
R21 "12.1 kOhms" "RES 0805_2012" 118.447,170.764 r270 top locked
R22 "4.99 kOhms" "RES 0805_2012" 121.7,166.025 r90 top
R23 "5.1 kOhms" "RES 0805_2012" 172.65,165.925 r0 top
R24 "243 kOhms" "RES 0805_2012" 189.196,170.561 r180 top
R25 "30.1 kOhms" "RES 0805_2012" 193.021,167.636 r0 top
R26 "10 kOhms" "RES 0805_2012" 188.22,164.561 r180 top
R27 "5.1 kOhms" "RES 0805_2012" 151.027,173.018 r0 top locked
R28 "100 kOhms" "RES 0805_2012" 189.196,170.561 r0 bottom
R29 "10 kOhms" "RES 0805_2012" 193.021,168.536 r180 bottom
R30 "2 mOhms" "RES 0805_2012" 155.577,173.268 r0 top locked
R31 "1 kOhms" "RES 0805_2012" 184.475,149.025 r90 top
R32 "100 kOhms" "RES 0805_2012" 186.5,149.025 r270 top
R33 "12 kOhms" "YAGEO RES 0805_2012" 184.4,145.3 r270 top
R34 "10 kOhms" "RES 0805_2012" 179.775,134.325 r90 bottom
R35 "10 kOhms" "RES 0805_2012" 181.875,134.275 r90 bottom
R36 "10 kOhms" "RES 0805_2012" 177.6,134.35 r90 bottom
R37 "2 kOhms" "YAGEO RES 0805_2012" 177.6,137.975 r90 bottom
R38 "0 Ohms" "RES 0805_2012" 111.867,137.589 r0 top
R39 "CRCW08050000ZSTA" RESC2012X50N 102.2,103.15 r0 bottom
R40 "10 kOhms" "RES 0805_2012" 111.417,112.439 r90 top
R41 "10 kOhms" "RES 0805_2012" 36.35,131.175 r0 top
R42 "CRCW08050000ZSTA" RESC2012X50N 143.925,139.375 r270 bottom
R43 "CRCW08050000ZSTA" RESC2012X50N 102.175,108.775 r0 bottom
R44 "10 kOhms" "RES 0805_2012" 37.1,103.65 r0 top
R45 "47 kOhms" "RES 0805_2012" 72.175,84.45 r270 top
R46 "10 kOhms" "RES 0805_2012" 113.342,129.739 r180 bottom
R47 "4.7 kOhms" "YAGEO RES 0805_2012" 82.488,167.013 r270 top
R48 "5.1 kOhms" "RES 0805_2012" 80.337,170.737 r270 top
R49 "3.3 kOhms" "YAGEO RES 0805_2012" 86.613,172.712 r270 top
R50 "5.1 kOhms" "RES 0805_2012" 82.462,170.687 r90 top
R51 "100 Ohms" "RES 0805_2012" 99.099,79.549 r180 top
R52 "100 Ohms" "RES 0805_2012" 95.299,79.549 r180 top
R53 "100 Ohms" "RES 0805_2012" 90.75,64.025 r270 top
R54 "100 Ohms" "RES 0805_2012" 82.893,64.418 r270 bottom
R55 "100 Ohms" "RES 0805_2012" 164.35,79.525 r180 top
R56 "100 Ohms" "RES 0805_2012" 142.625,79.525 r180 top
R57 "100 Ohms" "RES 0805_2012" 120.949,79.474 r180 top
R58 "100 Ohms" "RES 0805_2012" 160.55,79.525 r180 top
R59 "100 Ohms" "RES 0805_2012" 138.825,79.525 r180 top
R60 "100 Ohms" "RES 0805_2012" 117.149,79.474 r180 top
R61 "100 Ohms" "RES 0805_2012" 155.875,64.025 r270 top
R62 "100 Ohms" "RES 0805_2012" 134.176,64.023 r270 top
R63 "100 Ohms" "RES 0805_2012" 148.05,64.45 r270 bottom
R64 "100 Ohms" "RES 0805_2012" 126.318,64.415 r270 bottom
R65 "100 Ohms" "RES 0805_2012" 112.511,64.036 r270 top
R66 "100 Ohms" "RES 0805_2012" 104.643,64.418 r270 bottom
R67 "100 Ohms" "RES 0805_2012" 77.474,79.499 r180 top
R68 "100 Ohms" "RES 0805_2012" 73.674,79.499 r180 top
R69 "5.1 kOhms" "RES 0805_2012" 195.225,144.35 r0 bottom
R70 "5.1 kOhms" "RES 0805_2012" 195.25,146.55 r0 bottom
R71 "12.1 kOhms" "RES 0805_2012" 192.996,165.611 r180 top
R72 "4.99 kOhms" "RES 0805_2012" 188.246,162.511 r0 top
R73 "5.1 kOhms" "RES 0805_2012" 152.452,165.418 r270 top locked
R74 "15 kOhms" "RES 0805_2012" 150.253,156.719 r90 top locked
R75 "15 kOhms" "RES 0805_2012" 152.285,156.719 r90 top locked
R76 "2 mOhms" "RES 0805_2012" 155.452,164.343 r0 top locked
R77 "10 kOhms" "RES 0805_2012" 68.775,116.075 r180 bottom
R78 "CRCW08050000ZSTA" RESC2012X50N 145.5,139.375 r270 bottom
R79 "CRCW060350R0FKEA" RESC1508X50N 111.825,149.45 r90 top
R80 "CRCW08050000ZSTA" RESC2012X50N 119.525,123.525 r0 bottom
R81 "CRCW08050000ZSTA" RESC2012X50N 102.225,114.508 r0 bottom
R82 "CRCW08050000ZSTA" RESC2012X50N 102.225,112.592 r0 bottom
R83 "CRCW08050000ZSTA" RESC2012X50N 111.875,118.9 r0 bottom
R84 "CRCW08050000ZSTA" RESC2012X50N 115.625,118.9 r0 bottom
R85 "CRCW08050000ZSTA" RESC2012X50N 102.225,110.675 r0 bottom
R86 "CRCW08050000ZSTA" RESC2012X50N 102.175,105.075 r0 bottom
R87 "CRCW08050000ZSTA" RESC2012X50N 102.175,106.9 r0 bottom
R88 "CRCW08050000ZSTA" RESC2012X50N 146.575,144 r270 bottom
R89 "CRCW08050000ZSTA" RESC2012X50N 147.575,139.4 r270 bottom
R90 "CRCW08050000ZSTA" RESC2012X50N 148.55,143.95 r270 bottom
R91 "CRCW08050000ZSTA" RESC2012X50N 149.5,139.375 r270 bottom
U1 "1101M2S3CQE2" 1101M2S3CQE2 177.625,125.724 r0 top
U2 "TPS7A5701RTER" WQFN16_RTE_TEX_THERMAL 135.383,169.44 r0 top locked
U3 "TL1963A-33DCYR" DCY0004A_N 192.55,192.425 r90 top
U4 "TPS54KC23RZRR" RZR0016A-MFG_THERMAL 116.547,166.365 r0 top locked
U5 "TPS7A5701RTER" WQFN16_RTE_TEX_THERMAL 135.34,161.196 r0 top locked
U5_SelLoad1 "CD4066BM96" D0014A_N 53.575,117.215 r180 top (schematic designator U5)
U5_SelLoad2 "CD4066BM96" D0014A_N 53.55,126.515 r180 top (schematic designator U5)
U5_SelLoad3 "CD4066BM96" D0014A_N 53.55,107.715 r180 top (schematic designator U5)
U5_SelLoad4 "CD4066BM96" D0014A_N 62.9,107.115 r180 top (schematic designator U5)
U5_SelLoad5 "CD4066BM96" D0014A_N 82.2,108.065 r180 top (schematic designator U5)
U5_SelLoad6 "CD4066BM96" D0014A_N 72.475,107.115 r180 top (schematic designator U5)
U5_SelLoad7 "CD4066BM96" D0014A_N 81.975,127.065 r180 top (schematic designator U5)
U5_SelLoad8 "CD4066BM96" D0014A_N 82.025,117.615 r180 top (schematic designator U5)
U6 "TPS7A5701RTER" WQFN16_RTE_TEX_THERMAL 174.786,169.231 r180 top
U6_U_sink_iref_gen1 "ALD1101ASAL" 8-SOIC_ALD 75.575,75.6 r0 top (schematic designator U6)
U6_U_sink_iref_gen2 "ALD1101ASAL" 8-SOIC_ALD 97.2,75.6 r0 top (schematic designator U6)
U6_U_sink_iref_gen3 "ALD1101ASAL" 8-SOIC_ALD 119.075,75.6 r0 top (schematic designator U6)
U6_U_sink_iref_gen4 "ALD1101ASAL" 8-SOIC_ALD 140.725,75.6 r0 top (schematic designator U6)
U6_U_sink_iref_gen5 "ALD1101ASAL" 8-SOIC_ALD 162.45,75.6 r0 top (schematic designator U6)
U7 "TPS54KC23RZRR" RZR0016A-MFG_THERMAL 188.596,167.536 r270 top
U8 "TPS7A5701RTER" WQFN16_RTE_TEX_THERMAL 151.4,169.623 r0 top locked
U8_source_iref1 "TLV9061IDBVR" DBV5_TEX 78.108,70.62 r180 top (schematic designator U8)
U8_source_iref2 "TLV9061IDBVR" DBV5_TEX 99.733,70.62 r180 top (schematic designator U8)
U8_source_iref3 "TLV9061IDBVR" DBV5_TEX 121.608,70.62 r180 top (schematic designator U8)
U8_source_iref4 "TLV9061IDBVR" DBV5_TEX 143.258,70.62 r180 top (schematic designator U8)
U8_source_iref5 "TLV9061IDBVR" DBV5_TEX 164.983,70.62 r180 top (schematic designator U8)
U8_source_iref_01 "TLV9061IDBVR" DBV5_TEX 88.308,70.62 r180 top (schematic designator U8)
U8_source_iref_02 "TLV9061IDBVR" DBV5_TEX 110.058,70.62 r180 top (schematic designator U8)
U8_source_iref_03 "TLV9061IDBVR" DBV5_TEX 131.733,70.617 r180 top (schematic designator U8)
U8_source_iref_04 "TLV9061IDBVR" DBV5_TEX 153.433,70.62 r180 top (schematic designator U8)
U9 "TPS7A5701RTER" WQFN16_RTE_TEX_THERMAL 151.258,161.088 r0 top locked
U9_source_iref1 "BSS138" SOT-23_3L_ONS 73.358,70.67 r90 top (schematic designator U9)
U9_source_iref2 "BSS138" SOT-23_3L_ONS 94.983,70.67 r90 top (schematic designator U9)
U9_source_iref3 "BSS138" SOT-23_3L_ONS 116.858,70.67 r90 top (schematic designator U9)
U9_source_iref4 "BSS138" SOT-23_3L_ONS 138.508,70.67 r90 top (schematic designator U9)
U9_source_iref5 "BSS138" SOT-23_3L_ONS 160.233,70.67 r90 top (schematic designator U9)
U9_source_iref_01 "BSS138" SOT-23_3L_ONS 83.558,70.67 r90 top (schematic designator U9)
U9_source_iref_02 "BSS138" SOT-23_3L_ONS 105.308,70.67 r90 top (schematic designator U9)
U9_source_iref_03 "BSS138" SOT-23_3L_ONS 126.983,70.667 r90 top (schematic designator U9)
U9_source_iref_04 "BSS138" SOT-23_3L_ONS 148.683,70.67 r90 top (schematic designator U9)
U10 "SN74LXCH1T45" "SC70 - duplicate" 168.017,156.175 r0 top
U11 "SN74LXCH1T45" "SC70 - duplicate" 168.017,153.218 r0 top
U12 "SN74LXCH1T45" "SC70 - duplicate" 168.017,150.261 r0 top
U13 "SN74LXCH1T45" "SC70 - duplicate" 168.017,147.304 r0 top
U14 "FT4232HQ-Reel" QFN64_2_L 178.418,145.635 r180 top locked
U15 "SN74LXCH1T45" "SC70 - duplicate" 168.017,144.347 r0 top
U16 "SN74LXCH1T45" "SC70 - duplicate" 168.017,141.39 r0 top
U17 "SN74LXCH1T45" "SC70 - duplicate" 168.017,138.433 r0 top
U18 "SN74LXCH1T45" "SC70 - duplicate" 168.017,135.476 r0 top
U19 "93LC56BT-E/OT" SOT-23-6_MC_MCH 180.83,137.875 r0 bottom
U20 "511MLFT" SOIC8_150MIL_REN 107.167,132.551 r90 top
U21 "ICL7660SCBAZ-TDKR" SOIC8_4X5_INR 100.007,168.638 r270 top
U22_source_iref1 "ALD1117SAL" 8-SOIC_ALD 75.555,65.183 r0 top (schematic designator U22)
U22_source_iref2 "ALD1117SAL" 8-SOIC_ALD 97.18,65.183 r0 top (schematic designator U22)
U22_source_iref3 "ALD1117SAL" 8-SOIC_ALD 119.055,65.183 r0 top (schematic designator U22)
U22_source_iref4 "ALD1117SAL" 8-SOIC_ALD 140.705,65.183 r0 top (schematic designator U22)
U22_source_iref5 "ALD1117SAL" 8-SOIC_ALD 162.43,65.183 r0 top (schematic designator U22)
U22_source_iref_01 "ALD1117SAL" 8-SOIC_ALD 85.755,65.183 r0 top (schematic designator U22)
U22_source_iref_02 "ALD1117SAL" 8-SOIC_ALD 107.505,65.183 r0 top (schematic designator U22)
U22_source_iref_03 "ALD1117SAL" 8-SOIC_ALD 129.181,65.18 r0 top (schematic designator U22)